# Altium PCB ioT.PcbDoc (part 1 of 3)
Units mm, origin at the board's own origin, x right, y up, seen from the top; angles counter-clockwise.
Board outline 92 x 94 mm, 4 copper layers (Top Layer, GROUND, POWER, Bottom Layer), stack 1.369 mm thick; 127 components, 88 nets, 449 pads, 105 vias.
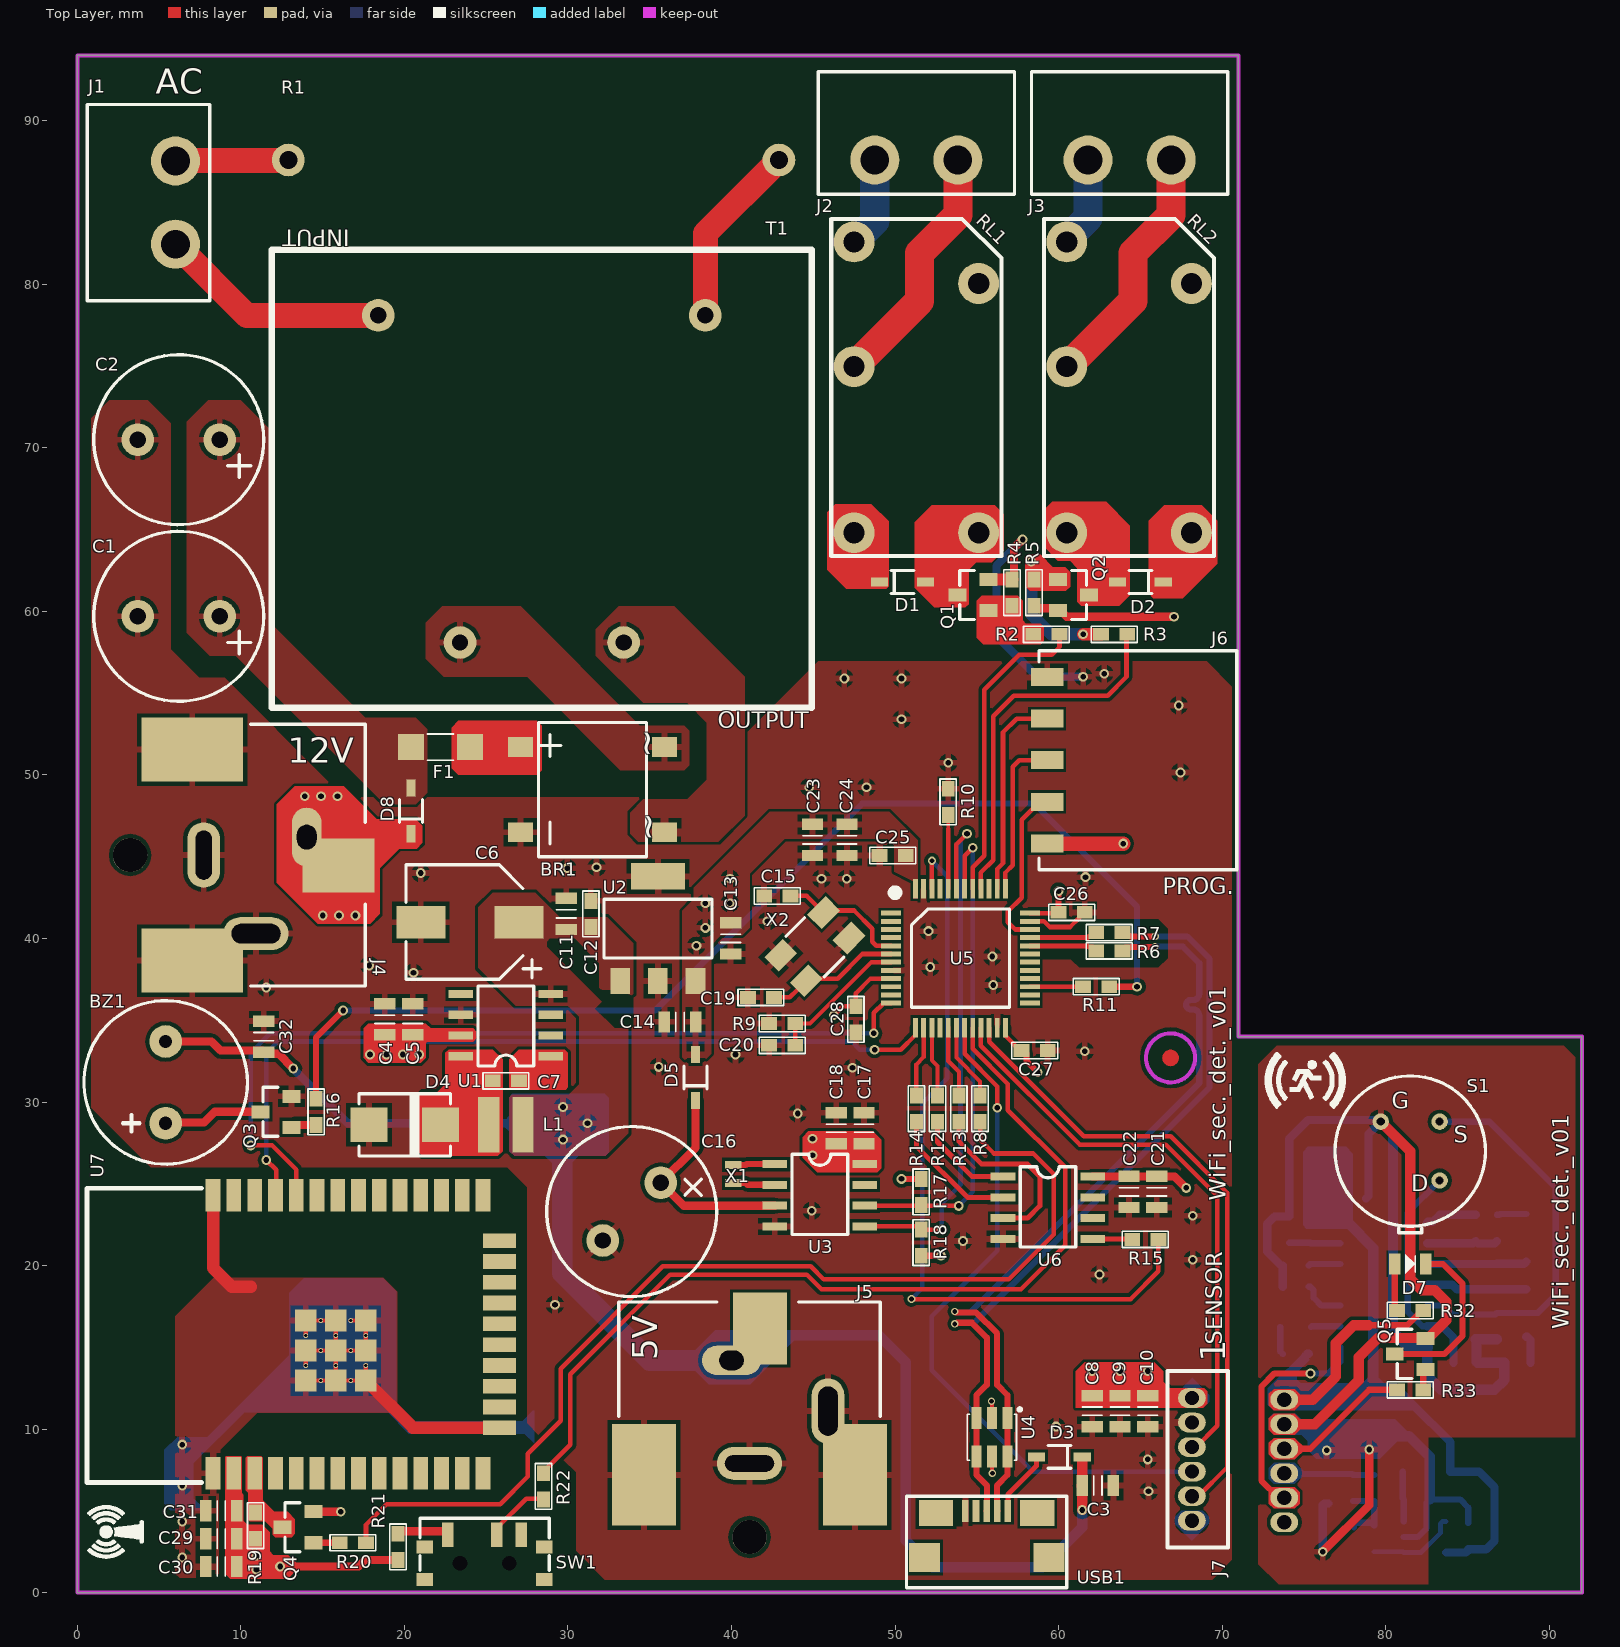
[diagram p0: Top Layer view]
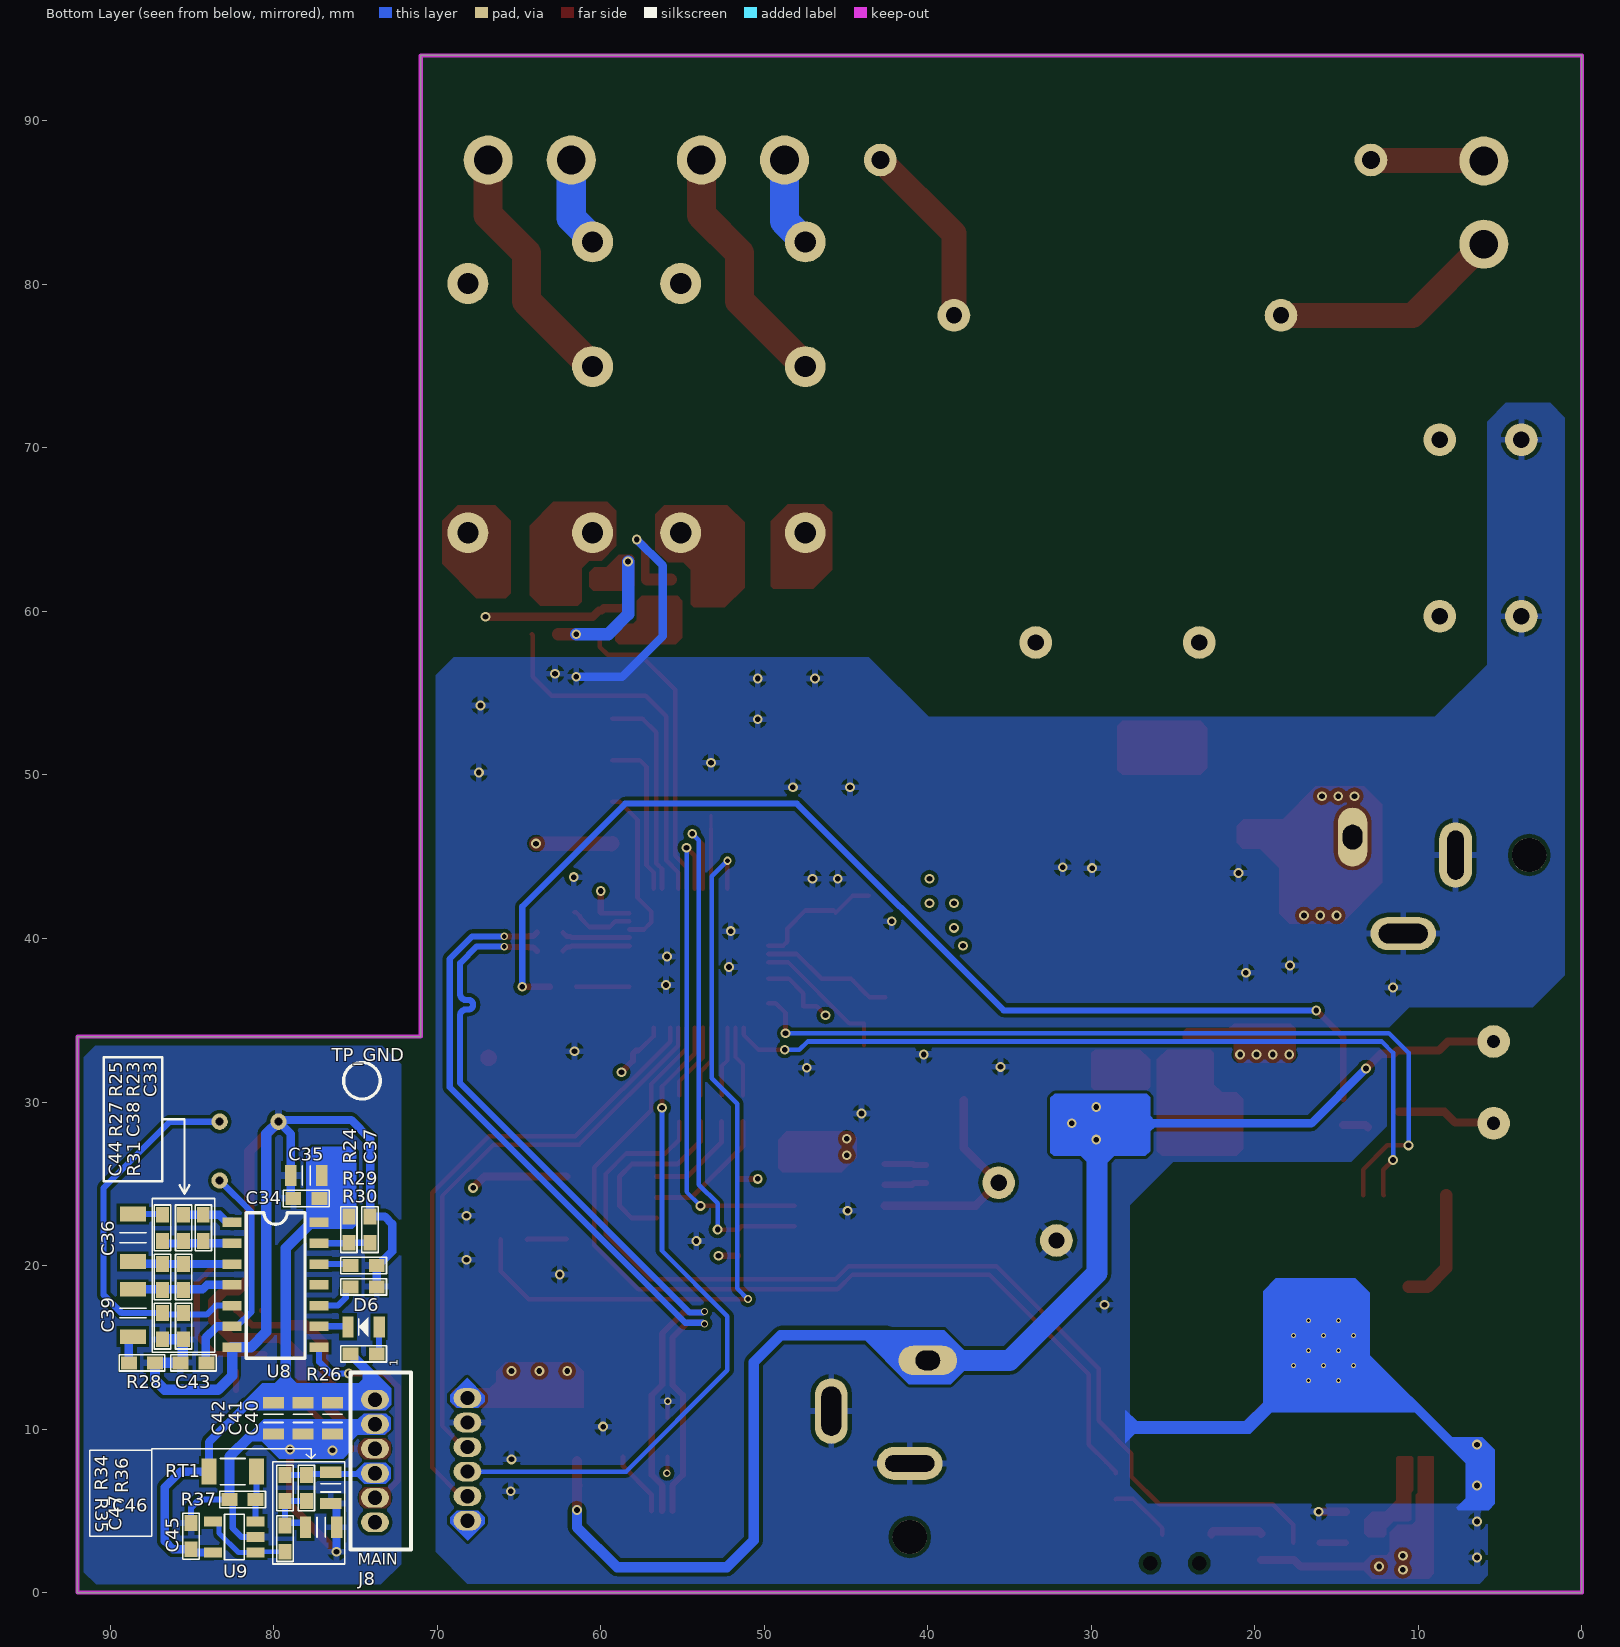
[diagram p1: Bottom Layer view, seen from below]
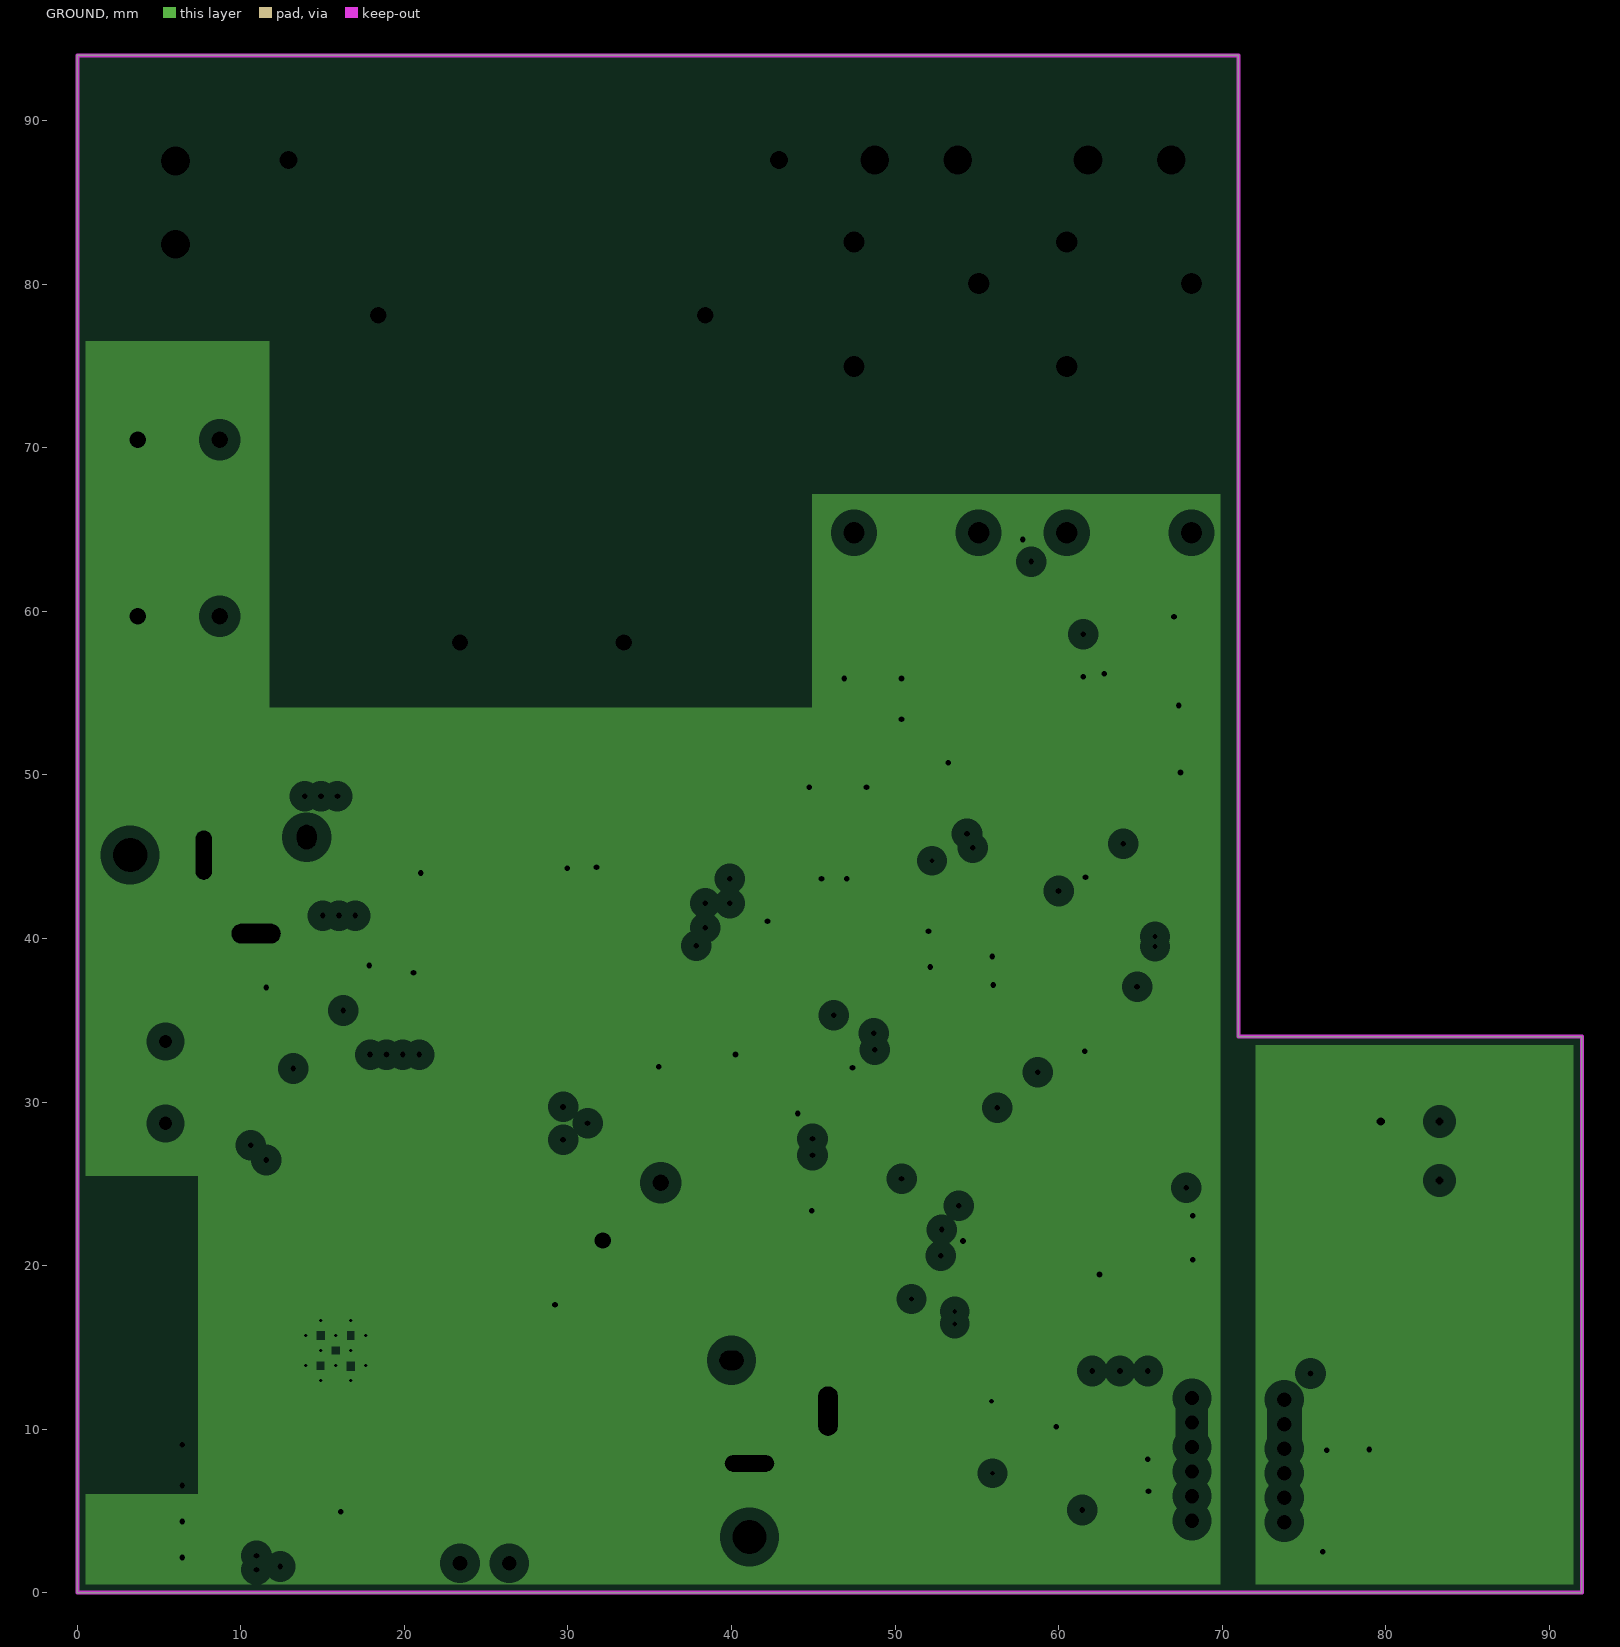
[diagram p2: GROUND, clearances drawn from the general rule]
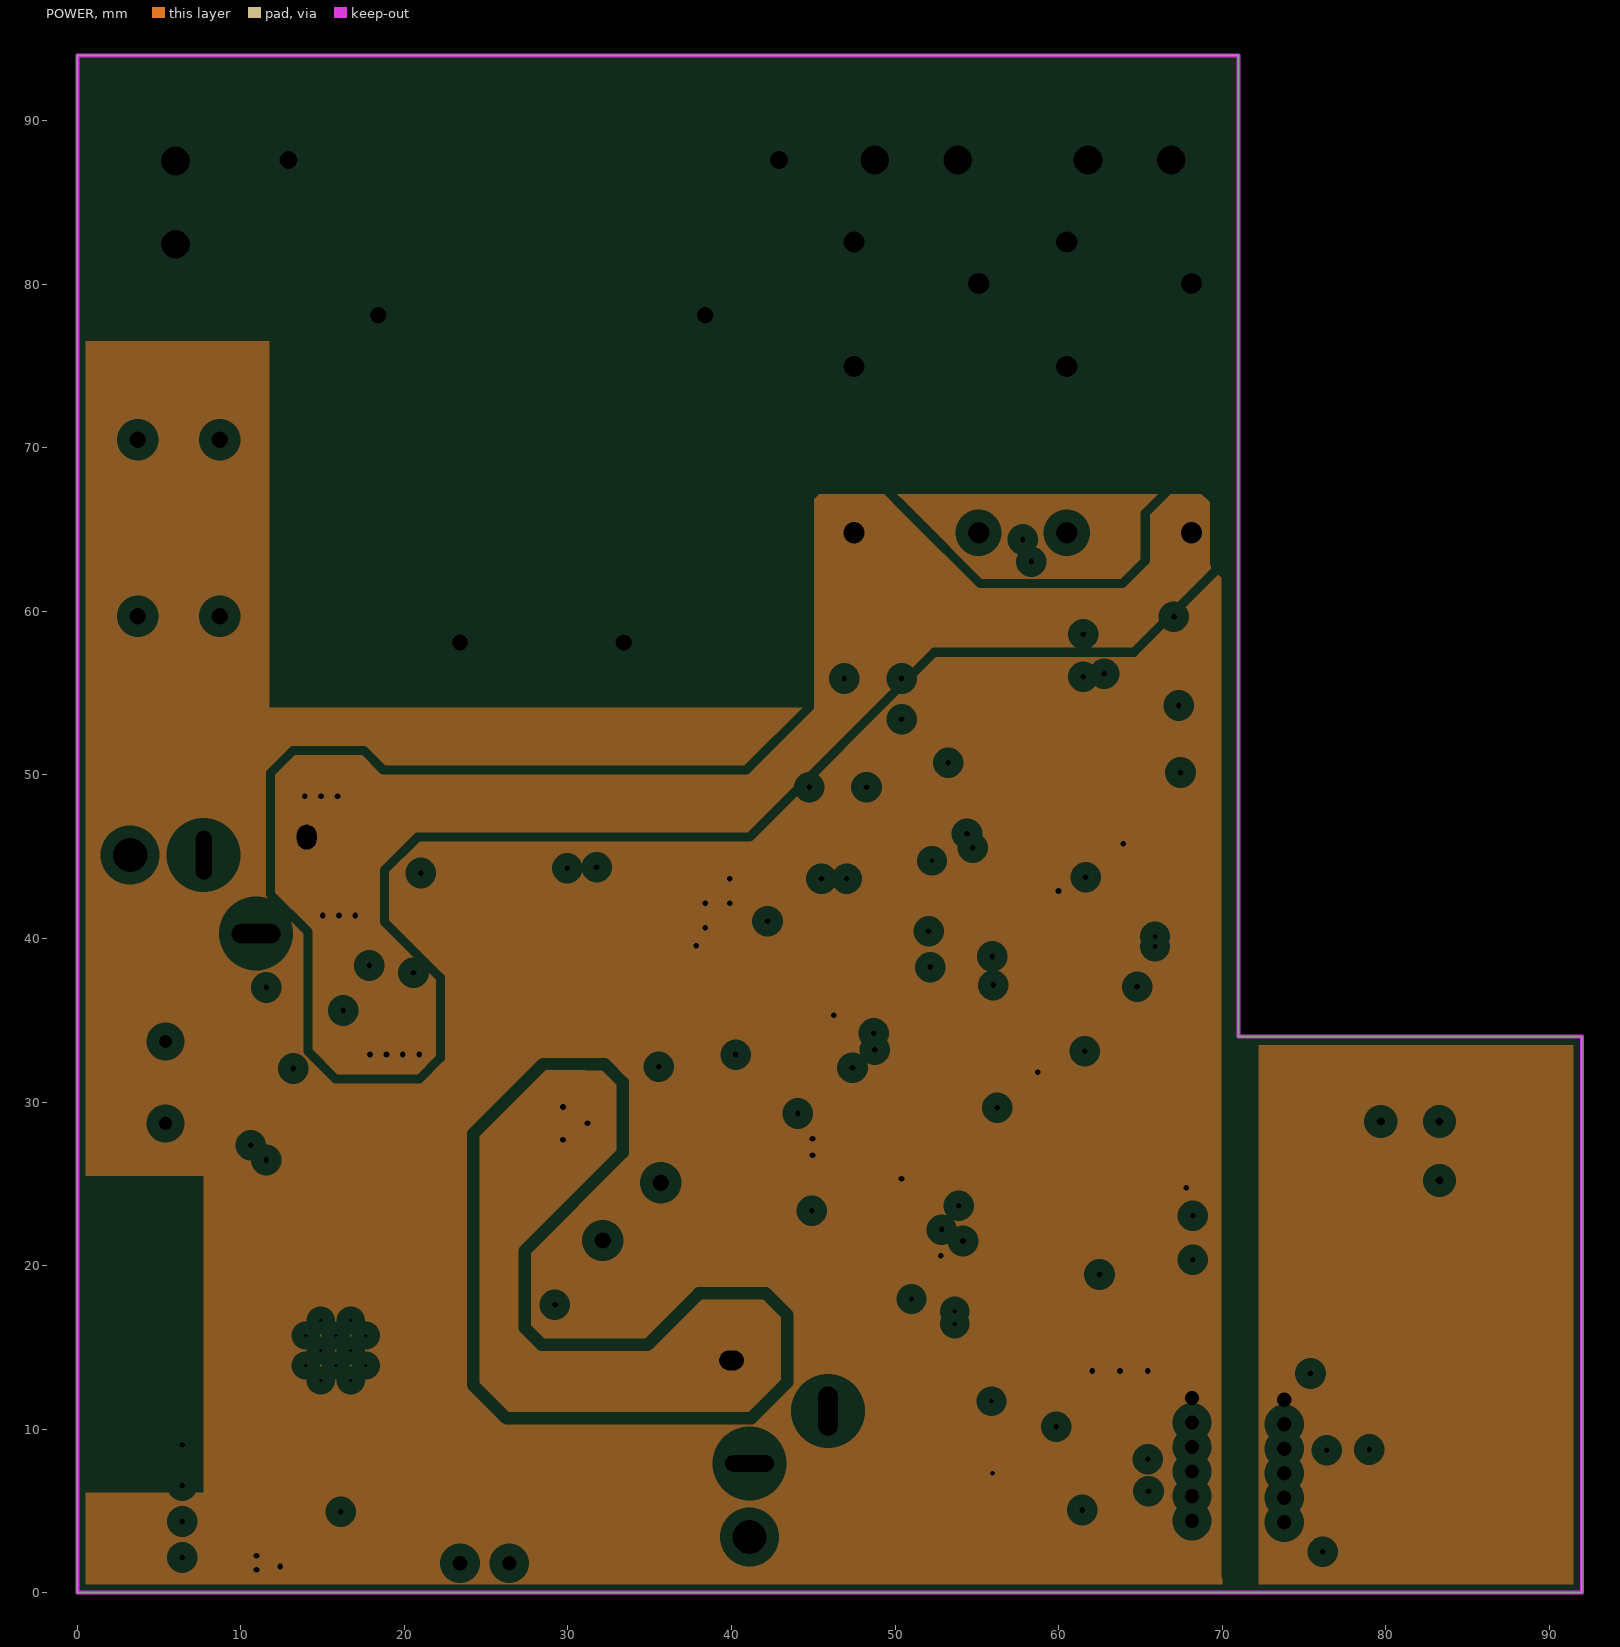
[diagram p3: POWER, clearances drawn from the general rule]
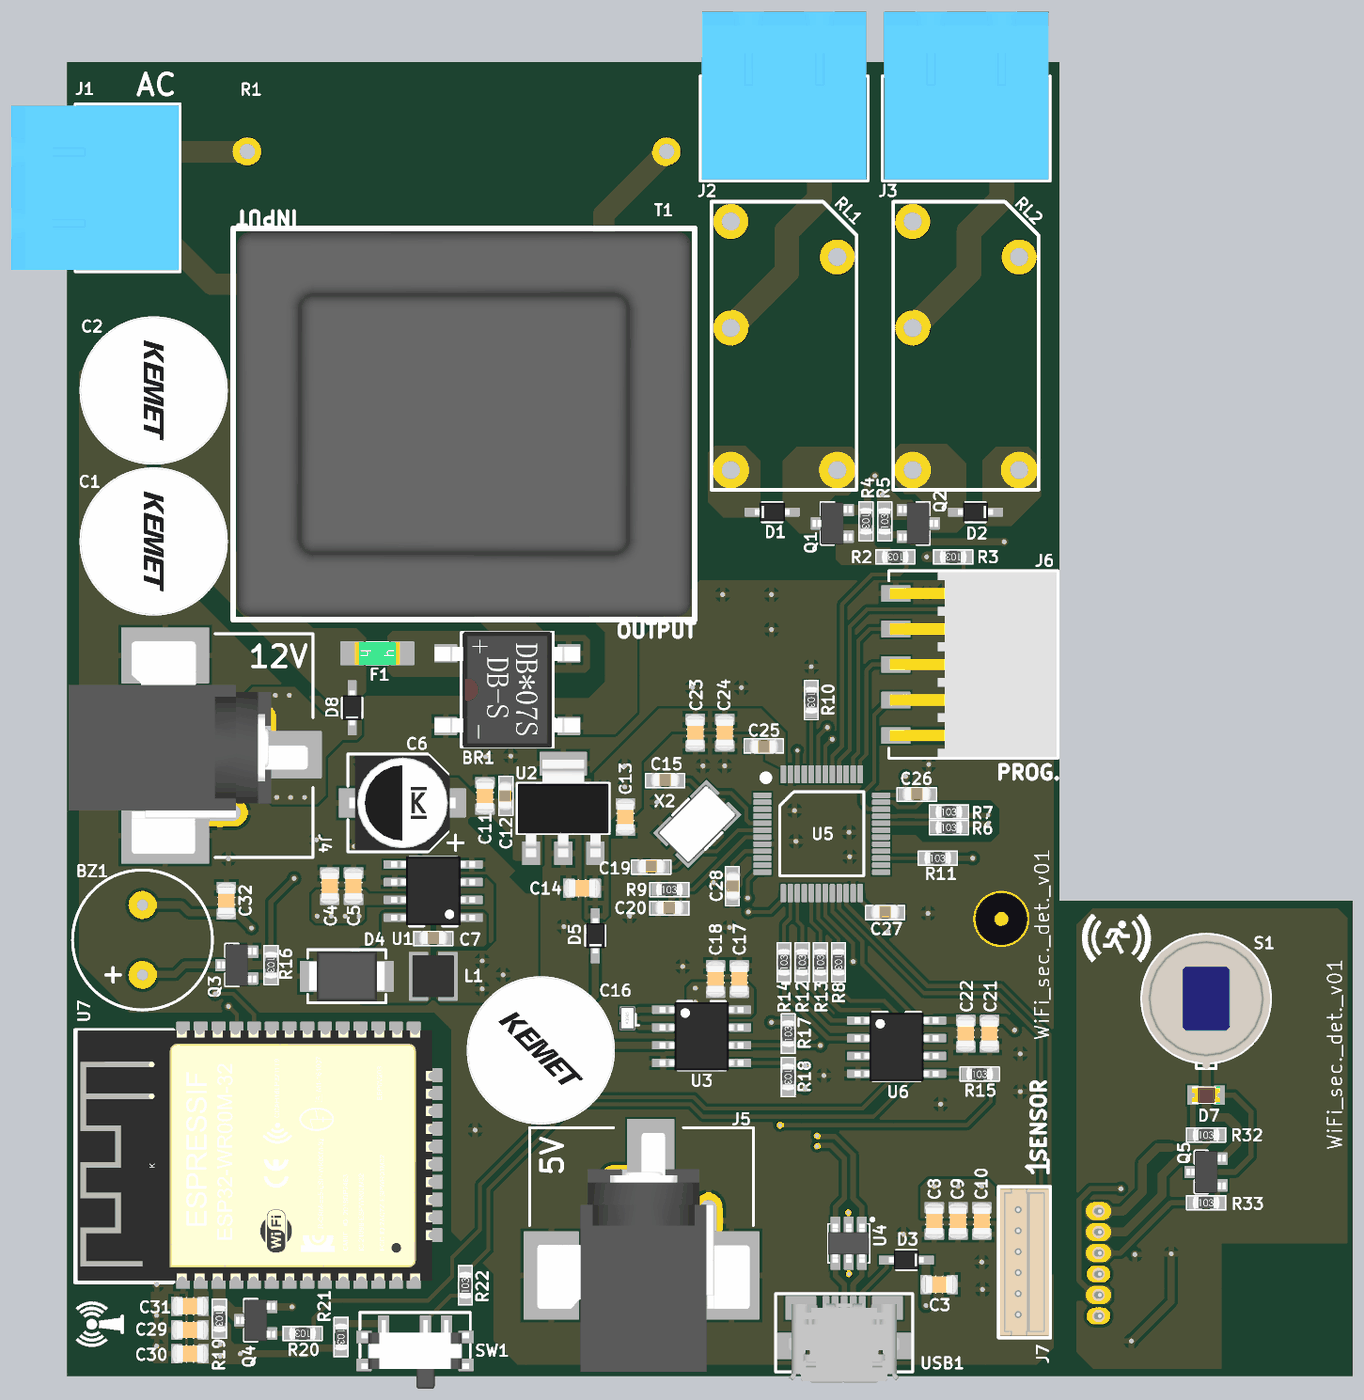
[diagram p5: 3D render of the assembled board from above, using the file's embedded part models]
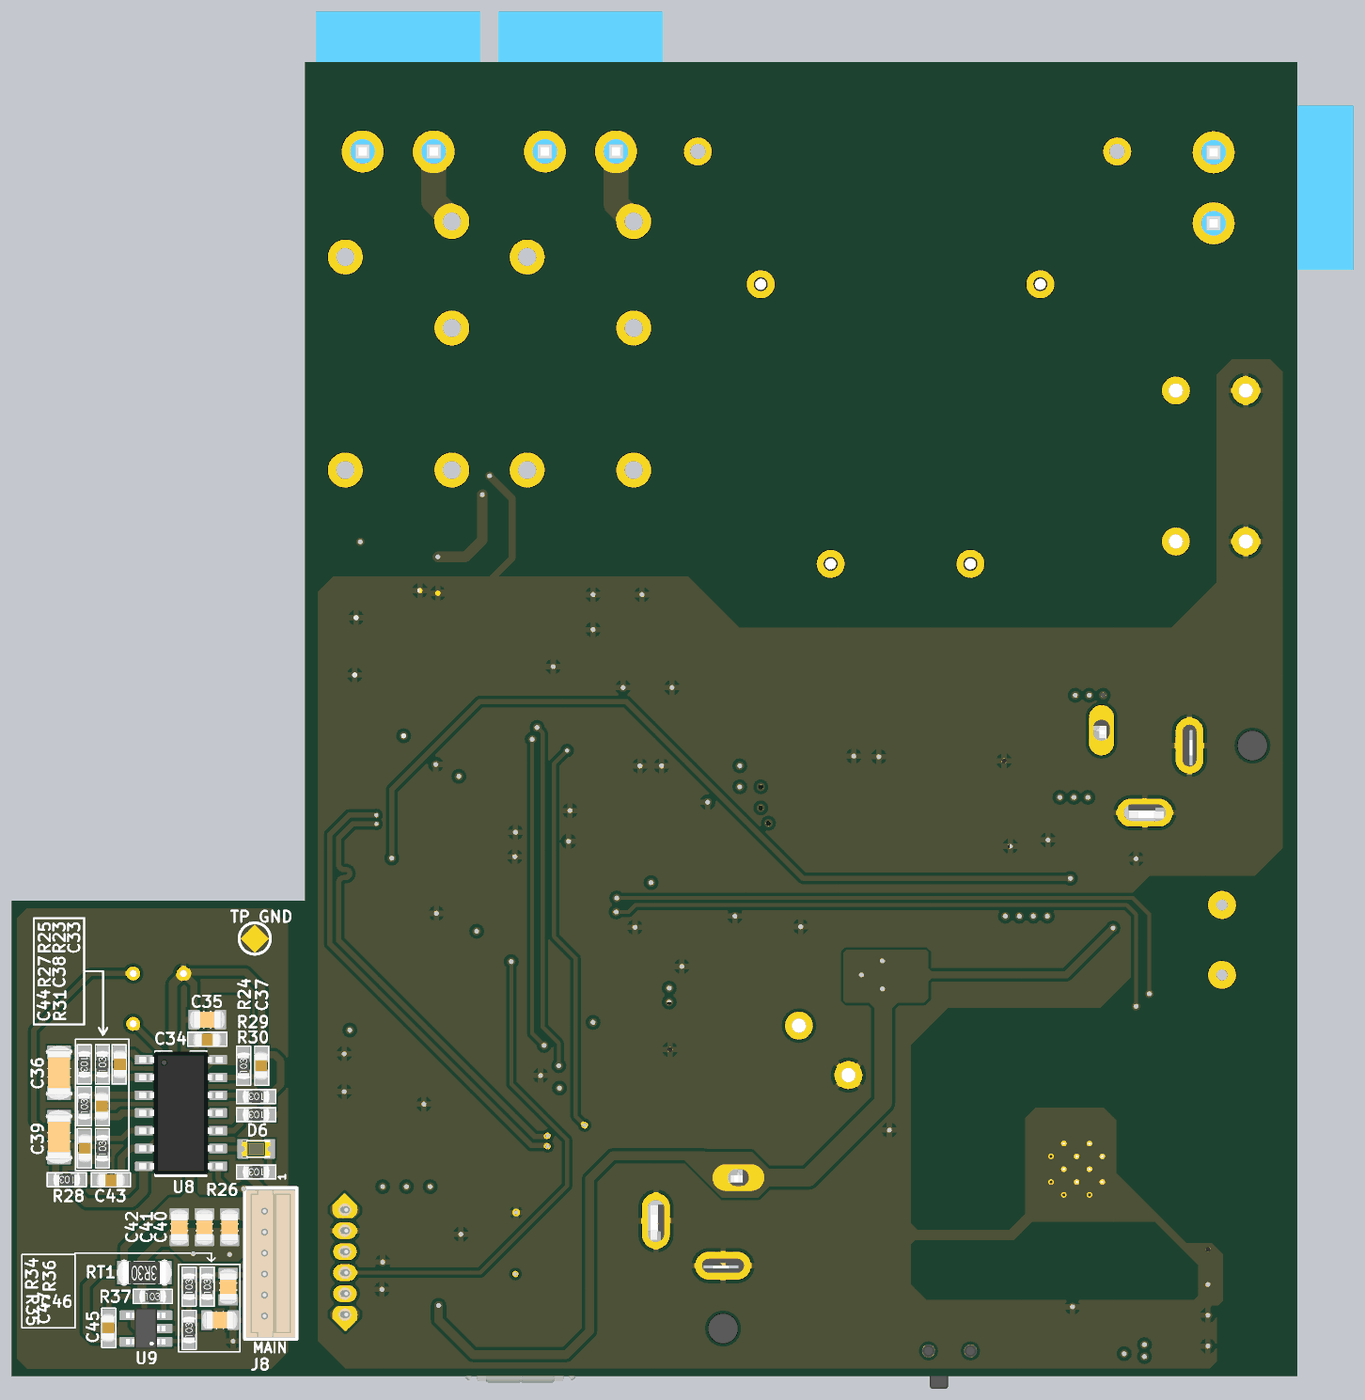
[diagram p6: 3D render of the assembled board from below, using the file's embedded part models]

## Layer stack, top to bottom
Top Solder: solder mask 0.0254, SM-001, Dk 4
Top Layer: signal copper 0.035
Dielectric 1: prepreg 0.1295, PP-017, Dk 4.3
Dielectric 2: prepreg 0.1295, PP-017, Dk 4.3
GROUND: plane copper 0.035, net GND
Dielectric 3: core 0.7112, Core-039, Dk 4.8
POWER: plane copper 0.035, net 3V3DC
Dielectric 4: prepreg 0.1295, PP-017, Dk 4.3
Dielectric 5: prepreg 0.1295, PP-017, Dk 4.3
Bottom Layer: signal copper 0.035
Bottom Solder: solder mask 0.0254, SM-001, Dk 4

## Board outline
0,0 0,94 71,94 71,34 92,34 92,0

## Design rules (kind name [scope] priority, off if disabled: settings)
Clearance [All] p1: gap=0.229 ignorepadtopadclearanceinfootprint=TRUE except(0: Arc-Text Track-Text SMDPad-Text THPad-Text Via-Text Fill-Text Poly-Text Region-Text Text-Text Text-Hole; 0.17: Via-Via; 0.178: Arc-Arc Arc-Track Arc-SMDPad Arc-Via Track-Track Track-SMDPad Track-Via SMDPad-Fill SMDPad-Poly SMDPad-Region Fill-Fill Fill-Poly Fill-Region Poly-Poly Poly-Region Region-Region; 0.203: SMDPad-SMDPad SMDPad-THPad THPad-THPad; 0.254: Arc-THPad Track-THPad SMDPad-Via THPad-Via)
ComponentClearance [All] p1: gap=0.127 collisioncheckmode=3 verticalgap=0 showdistances=FALSE
DiffPairsRouting [InDifferentialPair('MCU')] p1: maxlimit=0.208 minlimit=0.208 mostfreqgap=0.208 toplayer_minwidth=0.305 toplayer_maxwidth=0.305 toplayer_prefwidth=0.305 bottomlayer_minwidth=0.305 bottomlayer_maxwidth=0.305 bottomlayer_prefwidth=0.305 impedanceprofiledriven=TRUE impedanceprofileid={96FB6586-60D9-4EBF-BB90-8EEBB7620552} impedanceprofilevalue=90.000000 maxuncoupledlength=12.7
DiffPairsRouting DiffPairsRouting_1 [All] p2: maxlimit=0.254 minlimit=0.254 mostfreqgap=0.254 toplayer_minwidth=0.374 toplayer_maxwidth=0.374 toplayer_prefwidth=0.374 bottomlayer_minwidth=0.374 bottomlayer_maxwidth=0.374 bottomlayer_prefwidth=0.374 impedanceprofiledriven=TRUE impedanceprofileid={05F002BA-0FC2-4FD2-8811-82B23CEB2897} impedanceprofilevalue=90.000000 maxuncoupledlength=12.7
MinimumSolderMaskSliver [All] p1: minsoldermaskwidth=0.127
NetAntennae [All] p1: netantennaetolerance=0.254
PasteMaskExpansion [All] p1: expansion=0.05
PlaneClearance [All] p1: clearance=0.762
PlaneConnect [All] p1: planeconnectstyle=Relief reliefexpansion=0.381 reliefentries=4 reliefconductorwidth=0.381 reliefairgap=0.254
PolygonConnect [All] p1: connectstyle=Relief reliefconductorwidth=0.381 reliefentries=4 polygonreliefangle="90 Angle" airgapwidth=0.254
RoutingCorners [All] p1: cornerstyle=45-Degree minsetback=2.032 maxsetback=2.032
RoutingVias [All] p1: holewidth=0.3 width=0.5 viastyle="Through Hole" minholewidth=0.25 minwidth=0.4 maxholewidth=0.5 maxwidth=1
SMDToCorner [All] p1: distance=10000
SilkToSilkClearance [All] p1 off: silktosilkclearance=0
SilkToSolderMaskClearance [IsPad] p1 off: minsilkscreentomaskgap=0.127 clearancetoexposedcopper=TRUE
SolderMaskExpansion [All] p1: expansion=0.05 istentingtop=FALSE
UnRoutedNet [All] p1: checkbadconnections=TRUE
Width [All] p1: maxlimit=1.778 minlimit=0.203 preferedwidth=0.279 minimp=50.000000 maximp=50.000000 favimp=50.000000
19 further rules are at their usual default settings.

## Classes and differential pairs
component class "Sensor Board": C33 C34 C35 C36 C37 C38 C39 C40 C41 C42 C43 C44 C45 C46 C47 D6 D7 J8 Q5 R23 R24 R25 R26 R27 R28 R29 R30 R31 R32 R33 R34 R35 R36 R37 RT1 S1 U8 U9
component class "Power Management": BR1 C1 C2 C3 C4 C5 C6 C7 C8 C9 C10 C11 C12 C13 C14 D1 D2 D3 D4 D8 F1 J1 J2 J3 J4 J5 J6 J7 L1 Q1 Q2 R1 R2 R3 R4 R5 RL1 RL2 U1 U2 USB1
component class Microcontroller: BZ1 C15 C16 C17 C18 C19 C20 C21 C22 C23 C24 C25 C26 C27 C28 C29 C30 C31 C32 D5 Q3 Q4 R6 R7 R8 R9 R10 R11 R12 R13 R14 R15 R16 R17 R18 R19 R20 R21 R22 SW1 U3 U4 U5 U6 U7 X1 X2
differential pair MCU: +MCU_P -MCU_N
differential pair USB: +USB_P -USB_N

## Components (designator, comment, footprint, x,y, rotation, side; value= is the part's Value field where it differs from the comment)
BR1 "DB105STR" DB105STR 31.5,49.1 r90 top
BZ1 "CMI-9605IC-0580T" CMI-9605IC 5.4,31.2 r180 top
C1 "ESH477M050AH4AA" CAP_RADIAL_D10_P5 6.2,59.7 r180 top
C2 "ESH477M050AH4AA" CAP_RADIAL_D10_P5 6.2,70.5 r180 top
C3 "CL21A475KAQNNNE" CAP_0805 62.4,6.55 r180 top
C4 "CL21B105KBFNNNE" CAP_0805 18.8,35.05 r270 top
C5 "CL21B104KBCNNNC" CAP_0805 20.5,35.05 r270 top
C6 "EEV686M035A9HAA" CAP_EEVSERIES 24,41 r180 top
C7 "0603B103K160CT" CAP_0603 26.2,31.3 r180 top
C8 "CL21A475KAQNNNE" CAP_0805 62.05,11.1 r90 top
C9 "CL21A475KAQNNNE" CAP_0805 63.75,11.1 r90 top
C10 "CL21B105KBFNNNE" CAP_0805 65.45,11.1 r90 top
C11 "CL21B105KBFNNNE" CAP_0805 29.9,41.5 r270 top
C12 "C0603C104K5RACTU" CAP_0603 31.4,41.5 r270 top
C13 "CL21A475KAQNNNE" CAP_0805 39.95,40 r90 top
C14 "CL21B105KBFNNNE" CAP_0805 36.85,34.9 r0 top
C15 "CL10C200JB8NNNC" CAP_0603 42.8,42.6 r180 top
C16 "ESH477M050AH4AA" CAP_RADIAL_D10_P5 33.9,23.3 r225 top
C17 "CL21B104KBCNNNC" CAP_0805 48.1,28.4 r270 top
C18 "CL21B105KBFNNNE" CAP_0805 46.4,28.4 r270 top
C19 "CL10C200JB8NNNC" CAP_0603 41.8,36.4 r180 top
C20 "C0603C104K5RACTU" CAP_0603 43.1,33.468 r180 top
C21 "CL21B105KBFNNNE" CAP_0805 66,24.5 r90 top
C22 "CL21B104KBCNNNC" CAP_0805 64.3,24.5 r90 top
C23 "CL21A475KAQNNNE" CAP_0805 44.95,46.024 r90 top
C24 "CL21B105KBFNNNE" CAP_0805 47.059,46.024 r90 top
C25 "C0603C104K5RACTU" CAP_0603 49.855,45.074 r0 top
C26 "C0603C104K5RACTU" CAP_0603 60.8,41.6 r180 top
C27 "C0603C104K5RACTU" CAP_0603 58.538,33.151 r180 top
C28 "C0603C104K5RACTU" CAP_0603 47.6,35.05 r90 top
C29 "CL21A475KAQNNNE" CAP_0805 8.8,3.3 r0 top
C30 "CL21B105KBFNNNE" CAP_0805 8.8,1.6 r0 top
C31 "CL21B104KBCNNNC" CAP_0805 8.8,5 r0 top
C32 "CL21B104KBCNNNC" CAP_0805 11.4,34 r270 top
C33 "0603B103K160CT" CAP_0603 84.3,22.3 r90 bottom
C34 "C0603C104K5RACTU" CAP_0603 78,24.1 r180 bottom
C35 "CL21B105KBFNNNE" CAP_0805 78,25.5 r180 bottom
C36 "C3216X5R1E336M160AC" CAP_1206 88.6,21.7 r90 bottom
C37 "C0603C104K5RACTU" CAP_0603 74.1,22.2 r270 bottom
C38 "0603B103K160CT" CAP_0603 85.5,19.3 r270 bottom
C39 "C3216X5R1E336M160AC" CAP_1206 88.6,17.1 r90 bottom
C40 "CL21A475KAQNNNE" CAP_0805 76.4,10.65 r90 bottom
C41 "CL21A475KAQNNNE" CAP_0805 78.2,10.65 r90 bottom
C42 "CL21B105KBFNNNE" CAP_0805 80,10.65 r90 bottom
C43 "C0603C104K5RACTU" CAP_0603 84.9,14.05 r180 bottom
C44 "C0603C104K5RACTU" CAP_0603 86.8,16.3 r90 bottom
C45 "C0603C104K5RACTU" CAP_0603 85.05,3.45 r270 bottom
C46 "CL21A475KAQNNNE" CAP_0805 77.1,4 r0 bottom
C47 "CL21B105KBFNNNE" CAP_0805 76.5,6.4 r90 bottom
D1 "1N4148WS" SOD323F 50.455,61.8 r0 top
D2 "1N4148WS" SOD323F 65,61.8 r180 top
D3 "1N4148WS" SOD323F 60.05,8.3 r180 top
D4 "1SMB5919BT3G" SMB 20.015,28.6 r180 top
D5 "1N4148WS" SOD323F 37.8,31.5 r90 top
D6 "LTST-C171GKT" LED_GREEN_0805 74.5,16.25 r180 bottom
D7 "LH R974-LP-1" LED_RED_0805 81.5,20.1 r180 top
D8 "1N4148WS" SOD323F 20.4,47.8 r90 top
F1 "3413.0216.22" 3413.0216.22 22.2,51.7 r180 top
J1 "TBP01R1-508-02BE" TBP01R1-508 6,85 r270 top
J2 "TBP01R1-508-02BE" TBP01R1-508 51.3,87.6 r180 top
J3 "TBP01R1-508-02BE" TBP01R1-508 64.34,87.6 r180 top
J4 "PJ-037AH-SMT-TR" JACK 9.6,45.1 r0 top
J5 "PJ-037AH-SMT-TR" JACK 41.1,9.775 r90 top
J6 "SMH-105-02-L-S" PINHEADER1X5_RA 59.3,50.9 r90 top
J7 "64800611622" 64800611622 68.15,8.15 r270 top
J8 "64800611622" 64800611622 73.8,8.05 r270 bottom
L1 "78438335470" IND_1212 26.2,28.6 r0 top
Q1 "MMBT3904-7-F" SOT-23F 54.755,61 r90 top
Q2 "MMBT3904-7-F" SOT-23F 60.9,61 r270 top
Q3 "MMBT3904-7-F" SOT-23F 12.145,29.4 r90 top
Q4 "MMBT3904-7-F" SOT-23F 13.5,4 r90 top
Q5 "MMBT3904-7-F" SOT-23F 81.5,14.6 r90 top
R1 "5WD27" RES_AXIAL_W 27.9,87.6 r0 top
R2 "RC0603FR-0710KL" RES_0603 59.255,58.6 r180 top
R3 "RC0603FR-0710KL" RES_0603 63.4,58.6 r180 top
R4 "RC0603FR-0710KL" RES_0603 57.155,61.15 r270 top
R5 "RC0603FR-0710KL" RES_0603 58.5,61.15 r90 top
R6 "RC0603JR-0715RL" RES_0603 63.1,39.241 r0 top
R7 "RC0603JR-0715RL" RES_0603 63.1,40.359 r0 top
R8 "RC0603JR-07100RL" RES_0603 55.2,29.6 r270 top
R9 "RC0603JR-07100RL" RES_0603 43.1,34.8 r0 top
R10 "RC0603JR-07100RL" RES_0603 53.25,48.35 r270 top
R11 "RC0603JR-07100RL" RES_0603 62.3,37.05 r0 top
R12 "RC0603JR-07100RL" RES_0603 52.6,29.6 r90 top
R13 "RC0603JR-07100RL" RES_0603 53.9,29.6 r90 top
R14 "RC0603JR-07100RL" RES_0603 51.3,29.6 r90 top
R15 "RC0603JR-07100RL" RES_0603 65.3,21.6 r0 top
R16 "RC0603JR-07100RL" RES_0603 14.6,29.4 r270 top
R17 "RC0603JR-074K7L" RES_0603 51.6,24.5 r90 top
R18 "RC0603JR-074K7L" RES_0603 51.6,21.4 r270 top
R19 "RC0603FR-0710KL" RES_0603 10.9,4.1 r270 top
R20 "RC0603JR-07100RL" RES_0603 16.85,3.05 r180 top
R21 "RC0603JR-07100RL" RES_0603 19.6,2.8 r270 top
R22 "RC0603JR-07100RL" RES_0603 28.5,6.5 r90 top
R23 "RC0603JR-07560KL" RES_0603 85.5,22.3 r90 bottom
R24 "RC0603JR-07220KL" RES_0603 75.4,22.2 r90 bottom
R25 "RC0603FR-0710KL" RES_0603 86.8,22.3 r270 bottom
R26 "RC0603FR-0710KL" RES_0603 74.5,14.6 r0 bottom
R27 "RC0603JR-07560KL" RES_0603 86.8,19.3 r90 bottom
R28 "RC0603FR-0710KL" RES_0603 88.05,14.05 r0 bottom
R29 "RC0603JR-070RL" RES_0603 74.5,20 r0 bottom
R30 "RC0603JR-070RL" RES_0603 74.5,18.7 r0 bottom
R31 "RC0603JR-0743KL" RES_0603 85.5,16.3 r90 bottom
R32 "RC0603JR-07100RL" RES_0603 81.5,17.25 r0 top
R33 "RC0603FR-0710KL" RES_0603 81.5,12.4 r0 top
R34 "RC0603JR-07220KL" RES_0603 79.3,6.4 r90 bottom
R35 "RC0603FR-0710KL" RES_0603 79.3,3.3 r90 bottom
R36 "RC0603JR-07220KL" RES_0603 78,6.4 r90 bottom
R37 "RC0603FR-0710KL" RES_0603 81.9,5.7 r180 bottom
RL1 "ALQ112" ALQ112 51.3,73.7 r90 top
RL2 "ALQ112" ALQ112 64.31,73.7 r90 top
RT1 "TFPT1206L1002FM" RES_1206 82.5,7.4 r0 bottom
S1 "LHI 878/3902" "LHI 878" 81.5,27 r0 top
SW1 "EG1215AA" EG1215AA 24.9,1.8 r0 top
T1 "BV302S12010-ZU" BV302S 28.4,68.1 r0 top
U1 "LM2675MX-12/NOPB" SOIC8 26.2,34.7 r90 top
U2 "AP7361-33E-13" SOT223 35.5,40.6 r0 top
U3 "M41T00M6F" SOIC8 45.4,24.3 r270 top
U4 "USBLC6-2SC6" SOT23-6L 55.925,9.5 r270 top
U5 "STM32F103C6T6A" LQFP-48 54,38.8 r270 top
U6 "MAX6662" SOIC8 59.35,23.535 r270 top
U7 "ESP32-WROOM-32" ESP32-32 13.56,15.8 r90 top
U8 "NCS36000DRG" SOIC14 79.881,18.824 r180 bottom
U9 "OPA314AIDBVR" SOT23-5 82.4,3.4 r0 bottom
USB1 "10118192-0001LF" MICRO_B_USB 55.6,5 r0 top
X1 "ABS05-32.768KHZ-T" ABS05 40.1,25.6 r90 top
X2 "ECS-160-20-30B-TR" ECS 45.1,39.5 r45 top

## Footprints (in the part's own frame and the unit in brackets; to place one, negate y for a bottom-side part, rotate by r counter-clockwise, add the part's x,y. Pads: shape width x height; smd on the part's side, far side on the other; paste and mask are expansions set on the pad)
3413.0216.22 [mm]
  rect 1.6x1.6 smd mask+0.05: 1(-1.8,0) 2(1.8,0)
  silkscreen extent -0.8,-0.8 0.8,0.8, body extent -1.61,-0.8 1.61,0.8, height 0.64
64800611622 [mm]
  oval 1.2x1.7 hole 0.87 mask+0.05: 1(-3.75,0) 2(-2.25,0) 3(-0.75,0) 4(0.75,0) 5(2.25,0) 6(3.75,0)
  silkscreen extent -5.4,-1.5 5.4,2.2, body extent -5.25,-1.4 5.25,2.1, height 4.75
ABS05 [mm]
  rect 0.5x1 smd mask+0.05: 1(-0.55,0) 2(0.55,0)
  body extent -0.8,-0.5 0.8,0.5, height 0.5
ALQ112 [mm]
  round 2.5 hole 1.3 mask+0.05: 1(6.35,-3.81) 2(1.27,3.81) 3(8.89,3.81) 4(-8.89,-3.81) 5(-8.89,3.81)
  silkscreen extent -10.3,-5.2 10.3,5.2, body extent -10,-4.98 10,5.02, height 15.6
BV302S [mm]
  round 2 hole 1 mask+0.05: 1(10,10) 5(-10,10) 7(-5,-10) 9(5,-10)
  silkscreen extent -16.5,-14 16.5,14, body extent -16.25,-13.75 16.25,13.75, height 21.8
CAP_0603 [mil]
  rect 38x31 smd mask+1.97: 1(-31.5,0) 2(31.5,0)
  silkscreen extent -55,-20 55,20, body extent -41,-22 41,18, height 31
CAP_0805 [mm]
  rect 0.7x1.3 smd mask+0.05: 1(-0.95,0) 2(0.95,0)
  silkscreen extent -0.25,-0.6 0.25,0.6, body extent -1.3,-0.68 1.3,0.68, height 0.9
CAP_1206 [mm]
  rect 0.9x1.6 smd mask+0.05: 1(-1.45,0) 2(1.45,0)
  silkscreen extent -0.3,-0.8 0.3,0.8, body extent -1.97,-0.98 1.97,0.98, height 1.3
CAP_EEVSERIES [mm]
  rect 3x2 smd mask+0.05: 1(-3,0) 2(3,0)
  silkscreen extent -4.35,-3.5 3.9,3.5, body extent -3.8,-3.4 3.8,3.4, height 8.01
CAP_RADIAL_D10_P5 [mm]
  round 2 hole 1 mask+0.05: 1(-2.5,0) 2(2.5,0)
  silkscreen extent -5.2,-5.2 5.2,5.2, body extent -5.25,-5.25 5.25,5.25, height 22.2
CMI-9605IC [mm]
  round 2 hole 0.8 mask+0.05: 1(0,2.5) 2(0,-2.5)
  silkscreen extent -5,-5 5,5, body extent -4.8,-4.8 4.8,5.8, height 5.2
DB105STR [mm]
  rect 1.2x1.55 smd mask+0.05: 1(-2.605,-4.4) 2(2.605,-4.4) 3(2.605,4.4) 4(-2.605,4.4)
  silkscreen extent -4.1,-3.3 4.1,3.3, body extent -4.16,-5.2 4.16,5.2, height 2.66
ECS [mm]
  rect 1.6x1.25 smd mask+0.05: 1(-1.85,-1.1) 2(1.85,-1.1) 3(1.85,1.1) 4(-1.85,1.1)
  silkscreen extent -0.9,-1.7 0.8,1.7, body extent -2.5,-1.6 2.5,1.6, height 0.85
EG1215AA [mm]
  rect 0.7x1.5 smd mask+0.05: 1(-2.25,1.75) 2(0.75,1.75) 3(2.25,1.75)
  rect 1x0.8 smd mask+0.05: ""(-3.65,-1) ""(-3.65,1) ""(3.65,-1) ""(3.65,1)
  round 0 hole 0.9 mask+0.05: ""(-1.5,0) ""(1.5,0)
  silkscreen extent -3.95,-0.45 3.95,2.75, body extent -3.85,-2.7 3.85,2.2, height 1.38
ESP32-32 [mm]
  rect 2x0.9 smd mask+0.05: 1(-8.5,5.26) 2(-8.5,3.99) 3(-8.5,2.72) 4(-8.5,1.45) 5(-8.5,0.18) 6(-8.5,-1.09) 7(-8.5,-2.36) 8(-8.5,-3.63) 9(-8.5,-4.9) 10(-8.5,-6.17) 11(-8.5,-7.44) 12(-8.5,-8.71) 13(-8.5,-9.98) 14(-8.5,-11.25) 25(8.5,-11.25) 26(8.5,-9.98) 27(8.5,-8.71) 28(8.5,-7.44) 29(8.5,-6.17) 30(8.5,-4.9) 31(8.5,-3.63) 32(8.5,-2.36) 33(8.5,-1.09) 34(8.5,0.18) 35(8.5,1.45) 36(8.5,2.72) 37(8.5,3.99) 38(8.5,5.26)
  rect 0.9x2 smd mask+0.05: 15(-5.715,-12.25) 16(-4.445,-12.25) 17(-3.175,-12.25) 18(-1.905,-12.25) 19(-0.635,-12.25) 20(0.635,-12.25) 21(1.905,-12.25) 22(3.175,-12.25) 23(4.445,-12.25) 24(5.715,-12.25)
  rect 1.33x1.33 smd mask+0.05: 39(-2.835,-2.24) 39(-2.835,-0.405) 39(-2.835,-4.075) 39(-1,-0.405) 39(-1,-4.075) 39(-1,-2.24) 39(0.835,-0.405) 39(0.835,-4.075) 39(0.835,-2.24)
  round 0.3 hole 0.2 mask+0.05: 39(-2.835,-1.322) 39(-2.835,-3.157) 39(-1.917,-2.24) 39(-1.917,-0.405) 39(-1.917,-4.075) 39(-1,-1.322) 39(-1,-3.157) 39(-0.082,-0.405) 39(-0.082,-2.24) 39(-0.082,-4.075) 39(0.835,-1.322) 39(0.835,-3.157)
  silkscreen extent -9.07,5.97 8.93,12.97, body extent -8.97,-12.6 8.93,12.8, height 2.61
IND_1212 [mm]
  rect 1.3x3.4 smd mask+0.05: 1(-1.05,0) 2(1.05,0)
  body extent -1.5,-1.5 1.5,1.5, height 1.2
JACK [mm]
  oval 1.8x3.6 hole 1.2 slot 1.5 at 90 deg: 1(4.425,1.1)
  rect 4.4x3.3 smd: 1(6.375,-0.65)
  rect 6.2x3.9 smd: 2(-2.575,6.45) 3(-2.575,-6.45)
  oval 2x4 hole 1 slot 3 at 90 deg: 2(-1.875,0)
  oval 4x2 hole 1.2 slot 3 at 0 deg: 3(1.325,-4.8)
  round 2.1 hole 2.1 unplated: ""(-6.375,0)
  silkscreen extent 1,-8 8,8, body extent -9.48,-7.75 7.62,7.45, height 11.1
LED_GREEN_0805 [mm]
  rect 0.7x1.3 smd mask+0.05: 1(-0.95,0) 2(0.95,0)
  silkscreen extent -0.3,-0.6 0.3,0.6, body extent -1.01,-0.63 1.01,0.62, height 1.1
LED_RED_0805 [mm]
  rect 0.7x1.3 smd mask+0.05: 1(-0.95,0) 2(0.95,0)
  silkscreen extent -0.3,-0.6 0.3,0.6, body extent -1.01,-0.63 1.01,0.62, height 1.1
"LHI 878" [mm]
  round 1 hole 0.5 mask+0.05: 1(1.8,-1.8) 2(1.8,1.8) 3(-1.8,1.8)
  silkscreen extent -4.6,-5 4.6,4.6, body extent -4.6,-5.03 4.6,4.6, height 4.6
LQFP-48 [mm] "7mm x 7mm"
  rect 0.3x1.2 smd mask+0.05: 1(-2.75,-4.25) 2(-2.25,-4.25) 3(-1.75,-4.25) 4(-1.25,-4.25) 5(-0.75,-4.25) 6(-0.25,-4.25) 7(0.25,-4.25) 8(0.75,-4.25) 9(1.25,-4.25) 10(1.75,-4.25) 11(2.25,-4.25) 12(2.75,-4.25) 25(2.75,4.25) 26(2.25,4.25) 27(1.75,4.25) 28(1.25,4.25) 29(0.75,4.25) 30(0.25,4.25) 31(-0.25,4.25) 32(-0.75,4.25) 33(-1.25,4.25) 34(-1.75,4.25) 35(-2.25,4.25) 36(-2.75,4.25)
  rect 1.2x0.3 smd mask+0.05: 13(4.25,-2.75) 14(4.25,-2.25) 15(4.25,-1.75) 16(4.25,-1.25) 17(4.25,-0.75) 18(4.25,-0.25) 19(4.25,0.25) 20(4.25,0.75) 21(4.25,1.25) 22(4.25,1.75) 23(4.25,2.25) 24(4.25,2.75) 37(-4.25,2.75) 38(-4.25,2.25) 39(-4.25,1.75) 40(-4.25,1.25) 41(-4.25,0.75) 42(-4.25,0.25) 43(-4.25,-0.25) 44(-4.25,-0.75) 45(-4.25,-1.25) 46(-4.25,-1.75) 47(-4.25,-2.25) 48(-4.25,-2.75)
  silkscreen extent -4.2,-4.2 3,3, body extent -4.45,-4.45 4.55,4.55, height 1.5
MICRO_B_USB [mm]
  rect 0.4x1.35 smd mask+0.05: 1(1.3,0) 2(0.65,0) 3(0,0) 4(-0.65,0) 5(-1.3,0)
  rect 1.9x1.8 smd mask+0.05: ""(-3.8,-2.85) ""(3.8,-2.85)
  rect 2.1x1.6 smd mask+0.05: ""(-3.1,-0.122) ""(3.1,-0.122)
  silkscreen extent -4.9,-4.7 4.9,0.9, body extent -3.96,-5.46 3.96,0.2, height 2.79
PINHEADER1X5_RA [mm]
  rect 1.1x2 smd mask+0.05: 1(-5.08,0) 2(-2.54,0) 3(0,0) 4(2.54,0) 5(5.08,0)
  silkscreen extent -6.7,-11.6 6.7,0.5, body extent -6.6,-11.51 6.6,0.43, height 2.41
RES_0603 [mil]
  rect 38x31 smd mask+1.97: 1(-31.5,0) 2(31.5,0)
  silkscreen extent -55,-20 55,20, body extent -39,-19 39,20, height 17
RES_1206 [mm]
  rect 0.9x1.6 smd mask+0.05: 1(-1.45,0) 2(1.45,0)
  silkscreen extent -0.75,-0.8 0.75,0.8, body extent -1.98,-0.94 1.98,0.94, height 0.55
RES_AXIAL_W [mm]
  round 2 hole 1.1 mask+0.05: 1(-15,0) 2(15,0)
  body extent -15.4,-4.83 15.4,4.83, height 9.65
SMB [mm]
  rect 2.25x2.12 smd mask+0.05: A(2.185,0) C(-2.185,0)
  silkscreen extent -2.8,-1.9 2.8,1.9, body extent -2.72,-1.78 2.72,1.78, height 2.44
SOD323F [mm]
  rect 1.05x0.55 smd mask+0.05: 1(-1.4,0) 2(1.4,0)
  silkscreen extent -0.7,-0.7 0.7,0.7, body extent -1.25,-0.67 1.25,0.68, height 1
SOIC8 [mm]
  rect 0.5x1.5 smd mask+0.05: 1(-1.905,-2.75) 2(-0.635,-2.75) 3(0.635,-2.75) 4(1.905,-2.75) 5(1.905,2.75) 6(0.635,2.75) 7(-0.635,2.75) 8(-1.905,2.75)
  silkscreen extent -2.5,-1.7 2.4,1.7, body extent -2.45,-3 2.45,3, height 1.75
SOIC14 [mm]
  rect 1.18x0.58 smd mask+0.05: 1(-2.66,3.81) 2(-2.66,2.54) 3(-2.66,1.27) 4(-2.66,0) 5(-2.66,-1.27) 6(-2.66,-2.54) 7(-2.66,-3.81) 8(2.66,-3.81) 9(2.66,-2.54) 10(2.66,-1.27) 11(2.66,0) 12(2.66,1.27) 13(2.66,2.54) 14(2.66,3.81)
  silkscreen extent -1.8,-4.5 1.8,4.4, body extent -3,-4.4 3,4.4, height 1.7
SOT23-5 [mm]
  rect 1.1x0.6 smd mask+0.05: 1(-1.3,0.95) 2(-1.3,0) 3(-1.3,-0.95) 4(1.3,-0.95) 5(1.3,0.95)
  silkscreen extent -0.6,-1.4 0.6,1.4, body extent -1.4,-1.45 1.4,1.45, height 1.45
SOT23-6L [mm]
  rect 1.36x0.6 smd mask+0.05: 1(-1.175,0.95) 2(-1.175,0) 3(-1.175,-0.95) 4(1.175,-0.95) 5(1.175,0) 6(1.175,0.95)
  silkscreen extent -1.8,-1.5 1.4,1.8, body extent -1.4,-1.46 1.4,1.46, height 1.45
SOT223 [mm]
  rect 1.2x1.6 smd mask+0.05: 1(-2.3,-3.2) 2(0,-3.2) 3(2.3,-3.2)
  rect 3.3x1.6 smd mask+0.05: 2(0,3.2)
  silkscreen extent -3.3,-1.8 3.3,1.8, body extent -3.25,-3.48 3.25,3.48, height 1.65
SOT-23F [mm]
  rect 0.8x1.1 smd mask+0.05: 1(-0.95,-0.945) 2(0.95,-0.945) 3(0,0.945)
  silkscreen extent -1.5,-0.1 1.5,0.8, body extent -1.5,-1.42 1.5,1.42, height 1.2
TBP01R1-508 [mm]
  round 3 hole 1.75 mask+0.05: 1(-2.54,0) 2(2.54,0)
  silkscreen extent -6,-5.4 6,2.1, body extent -5.88,-10 5.88,2, height 8.55

## Part data
BR1: "Bridge Diode AC-DC", Manufacturer="Sangdest Microelectronics", Max Current=1A, Operating Voltage=600V, Supplier Part Number 1=1655-1821-1-ND, Designed by=BERK, Manufacturer Part Number=DB105STR, RoHS=No, Supplier 1=Digi-Key
BZ1: "Buzzers Indicator, Internally Driven Magnetic 5V 30mA 2.7kHz 80dB @ 5V, 10cm Through Hole PC Pins", Case/Package=CMI-9605IC, Manufacturer="CUI Devices", Supplier Part Number 1=2223-CMI-9605IC-0580T-ND, Designed by=BERK, Manufacturer Part Number=CMI-9605IC-0580T, Pricing 1="1=1,41000, 10=1,17900, 25=1,09080, 50=1,02680, 100=0,96490, 500=0,83018, 1000=0,77805 (USD)", RoHS=No, Stock 1=1663, Supplier 1=Digi-Key
C1 C2 C16: library part "CAP ALU ELEC 470uF 50V", "CAP ALU ELEC 470uF 50V RADIAL", Capacitance=470uF, Case/Package=Radial, Manufacturer=KEMET, Max Operating Temperature=105°C, Min Operating Temperature=-40°C, Supplier Part Number 1=399-15683-ND, Tolerance=20%, Voltage Rating=50V, ComponentLink1Description=https://api.kemet.com/component-edge/download/datasheet/ESH477M050AH4AA.pdf?src-supplier=Digi-Key, ComponentLink1URL=https://api.kemet.com/component-edge/download/datasheet/ESH477M050AH4AA.pdf?src-supplier=Digi-Key, Designed by=BERK, Life (Hours)=2000Hour, Manufacturer Part Number=ESH477M050AH4AA, Mount="Through Hole", Packaging=Bulk, Polarity=Polar, Pricing 1="1=0,59000, 10=0,41700, 50=0,31540, 100=0,27470, 500=0,20350, 1000=0,17298, 2500=0,16280, 5000=0,15262 (USD)", RoHS=No, RoHS Compliant=No, Stock 1=1181, Supplier 1=Digi-Key
C3 C8 C9 C13 C23 C29 C40 C41 C46: library part "CAP CER 4.7uF 0805", "CAP CER 4.7uF %10 0805", Capacitance=4.7uF, Case Code (Metric)=2012, Case Code (Imperial)=0805, Dielectric=X5R, Manufacturer=Samsung, Max Operating Temperature=85°C, Min Operating Temperature=-55°C, Package Quantity=1, Supplier Part Number 1=1276-1244-1-ND, Tolerance=10%, Voltage Rating=25V, Case/Package=0805, Category="Ceramic Capacitors", ComponentLink1Description=https://datasheet.ciiva.com/25798/cl21a475kaqnnne-25798882.pdf?src-supplier=Digi-Key, ComponentLink1URL=https://datasheet.ciiva.com/25798/cl21a475kaqnnne-25798882.pdf?src-supplier=Digi-Key, Construction=Flat, Depth=1.25mm, Designed by=BERK, Height=1.25mm, Lead Free="Lead Free", Length=2mm, Manufacturer Part Number=CL21A475KAQNNNE, Mount="Surface Mount", Packaging="Tape and Reel", Pricing 1="1=0,11000, 10=0,08100, 50=0,04580, 100=0,03800, 500=0,02664, 1000=0,02205 (USD)", Radiation Hardening=No, RoHS=Yes, RoHS Compliant=Yes, series=CL, Stock 1=1477018, Supplier 1=Digi-Key, Thickness=0.055inch, Voltage Rating (DC)=25V, Width=0.049inch
C4 C10 C11 C14 C18 C21 C24 C30 C35 C42 C47: library part "CAP CER 1uF 0805", "CAP CER 1uF %10 0805", Capacitance=1uF, Case Code (Metric)=2012, Case Code (Imperial)=0805, Dielectric=X7R, Manufacturer=Samsung, Max Operating Temperature=125°C, Min Operating Temperature=-55°C, Package Quantity=1, Supplier Part Number 1=1276-1029-2-ND, Tolerance=10%, Voltage=50V, Case/Package=0805, Category="Ceramic Capacitors", ComponentLink1Description=https://datasheet.ciiva.com/25800/cl21b105kbfnnne-25800291.pdf?src-supplier=Digi-Key, ComponentLink1URL=https://datasheet.ciiva.com/25800/cl21b105kbfnnne-25800291.pdf?src-supplier=Digi-Key, ComponentLink2Description=https://datasheet.ciiva.com/16449/cl21b105kbfnnne-16449003.pdf?src-supplier=Future+Electronics, ComponentLink2URL=https://datasheet.ciiva.com/16449/cl21b105kbfnnne-16449003.pdf?src-supplier=Future+Electronics, ComponentLink3Description=https://datasheet.ciiva.com/26838/getdatasheetpartid-354075-26838668.pdf?src-supplier=Verical, ComponentLink3URL=https://datasheet.ciiva.com/26838/getdatasheetpartid-354075-26838668.pdf?src-supplier=Verical, Construction=Flat, Depth=1.25mm, Designed by=BERK, Height=1.25mm, Length=2mm, Manufacturer Part Number=CL21B105KBFNNNE, Mount="Surface Mount", Packaging="Tape and Reel", Pricing 1="2000=0,02138, 4000=0,01956 (USD)", Radiation Hardening=No, RoHS=Yes, RoHS Compliant=Yes, series=CL, Stock 1=958000, Supplier 1=Digi-Key, Thickness=0.053inch, Voltage Rating=50V, Width=0.049inch
C5 C17 C22 C31 C32: library part "CAP CER 100nF 0805", "CAP CER 100nF %10 0805", Capacitance=100nF, Case Code (Metric)=2012, Case Code (Imperial)=0805, Dielectric=X7R, Manufacturer=Samsung, Max Operating Temperature=125°C, Min Operating Temperature=-55°C, Supplier Part Number 1=1276-1003-1-ND, Tolerance=10%, Voltage=50V, Case/Package=0805, Category="Ceramic Capacitors", ComponentLink1Description=https://datasheet.ciiva.com/25710/cl21b104kbcnnnc-25710182.pdf?src-supplier=Digi-Key, ComponentLink1URL=https://datasheet.ciiva.com/25710/cl21b104kbcnnnc-25710182.pdf?src-supplier=Digi-Key, ComponentLink2Description=https://datasheet.ciiva.com/29199/454152-da-01-en-vs-kondensator-0805-29199814.pdf?src-supplier=Conrad, ComponentLink2URL=https://datasheet.ciiva.com/29199/454152-da-01-en-vs-kondensator-0805-29199814.pdf?src-supplier=Conrad, Construction=Flat, Contact Plating=Tin, Depth=1.25mm, Designed by=BERK, Height=0.85mm, Lead Free="Lead Free", Length=2mm, Manufacturer Part Number=CL21B104KBCNNNC, Material=Ceramic, Mount="Surface Mount", Packaging="Tape and Reel", Pricing 1="1=0,10000, 10=0,04700, 50=0,02560, 100=0,02090, 500=0,01494, 1000=0,01174 (USD)", Radiation Hardening=No, RoHS=Yes, RoHS Compliant=Yes, series=CL, Stock 1=3371502, Supplier 1=Digi-Key, Thickness=0.037inch, Voltage Rating=50V, Voltage Rating (DC)=50V, Width=0.049inch
C6: library part "CAP ALU 68uF", "Cap Aluminum Lytic 68uF 35V 20% (6.3 X 7.7mm) SMD 280mA 2000h 105C T/R", Capacitance=68uF, Case/Package=Radial, Manufacturer=KEMET, Max Operating Temperature=105°C, Min Operating Temperature=-40°C, Package Quantity=1, Ripple Current=196mA, Supplier Part Number 1=399-6722-1-ND, Tolerance=20%, Voltage Rating=35V, Category="Aluminum Electrolytic Capacitors", ComponentLink1Description=https://datasheet.ciiva.com/5365/kem-a4002-eev-535332-5365784.pdf?src-supplier=Mouser, ComponentLink1URL=https://datasheet.ciiva.com/5365/kem-a4002-eev-535332-5365784.pdf?src-supplier=Mouser, Designator by=BERK, Height - Seated (Max)=0.315inch, Length=7.7mm, Life (Hours)=2000Hour, Manufacturer Part Number=EEV686M035A9HAA, Mount="Surface Mount", Packaging="Tape and Reel", Pricing 1="1=0,54000, 10=0,38000, 50=0,28740, 100=0,25040, 500=0,18546 (USD)", RoHS=Yes, RoHS Compliant=Yes, series=EEV, Stock 1=543, Supplier 1=Digi-Key, Termination=SMD/SMT, Voltage Rating (DC)=35V, Impedance=340mR
C7 C33 C38: library part "CAP CER 10nF 0603", "CAP CER 10nF %10 0603", Capacitance=10nF, Case Code (Metric)=1608, Case Code (Imperial)=0603, Dielectric=X7R, Manufacturer="Walsin Technologies", Max Operating Temperature=125°C, Min Operating Temperature=-55°C, Supplier Part Number 1=1292-1384-1-ND, Tolerance=10%, Voltage Rating=16V, Case/Package=0603, Category="Ceramic Capacitors", ComponentLink1Description=http://www.farnell.com/datasheets/1958513.pdf?src-supplier=Farnell, ComponentLink1URL=http://www.farnell.com/datasheets/1958513.pdf?src-supplier=Farnell, ComponentLink2Description=http://components.arrow.com/part/dataview/0323_00656382?src-supplier=Arrow+Europe, ComponentLink2URL=http://components.arrow.com/part/dataview/0323_00656382?src-supplier=Arrow+Europe, ComponentLink3Description=http://www.farnell.com/datasheets/1958513.pdf?src-supplier=Element14, ComponentLink3URL=http://www.farnell.com/datasheets/1958513.pdf?src-supplier=Element14, ComponentLink4Description=http://www.passivecomponent.com/wp-content/uploads/2018/10/MLCC.pdf?src-supplier=Digi-Key, ComponentLink4URL=http://www.passivecomponent.com/wp-content/uploads/2018/10/MLCC.pdf?src-supplier=Digi-Key, Depth=0.8mm, Designed by=BERK, Length=1.6mm, Manufacturer Part Number=0603B103K160CT, Packaging="Tape and Reel", Pricing 1="1=0,10000, 10=0,03600, 50=0,01940, 100=0,01590, 500=0,01136, 1000=0,00892 (USD)", REACH SVHC=Unknown, RoHS=Yes, RoHS Compliant=Yes, Stock 1=102474, Supplier 1=Digi-Key, Voltage Rating (DC)=16V
C12 C20 C25 C26 C27 C28 C34 C37 C43 C44 C45: library part "CAP CER 100nF 0603", "CAP CER 100nF %10 0603 SMD", Capacitance=100nF, Case Code (Metric)=1608, Case Code (Imperial)=0603, Dielectric=X7R, Dielectric Material=Ceramic, Manufacturer=KEMET, Max Operating Temperature=125°C, Min Operating Temperature=-55°C, Package Quantity=1, Supplier Part Number 1=399-5089-1-ND, Tolerance=10%, Voltage=50V, Case/Package=0603, Category="Ceramic Capacitors", ComponentLink1Description=https://datasheet.ciiva.com/7823/kem-c1002-x7r-smd-7823591.pdf?src-supplier=Element14, ComponentLink1URL=https://datasheet.ciiva.com/7823/kem-c1002-x7r-smd-7823591.pdf?src-supplier=Element14, ComponentLink2Description=https://datasheet.ciiva.com/14602/70095383-14602583.pdf?src-supplier=Allied+Electronics, ComponentLink2URL=https://datasheet.ciiva.com/14602/70095383-14602583.pdf?src-supplier=Allied+Electronics, ComponentLink3Description=https://datasheet.ciiva.com/5999/kem-c1002-x7r-smd-5999400.pdf?src-supplier=Farnell, ComponentLink3URL=https://datasheet.ciiva.com/5999/kem-c1002-x7r-smd-5999400.pdf?src-supplier=Farnell, ComponentLink4Description=https://datasheet.ciiva.com/7823/kem-c1002-x7r-smd-7823592.pdf?src-supplier=Element14, ComponentLink4URL=https://datasheet.ciiva.com/7823/kem-c1002-x7r-smd-7823592.pdf?src-supplier=Element14, ComponentLink5Description=https://datasheet.ciiva.com/28645/1851736-28645640.pdf?src-supplier=Element14, ComponentLink5URL=https://datasheet.ciiva.com/28645/1851736-28645640.pdf?src-supplier=Element14, ComponentLink6Description=https://datasheet.ciiva.com/14585/70095383-14585209.pdf?src-supplier=Allied+Electronics, ComponentLink6URL=https://datasheet.ciiva.com/14585/70095383-14585209.pdf?src-supplier=Allied+Electronics, Contact Plating=Tin,Matte, Depth=0.8mm, Designed by=BERK, Dissipation Factor=2.5%, Height=0.8mm, Lead Pitch=0.7mm, Length=0.063inch, Manufacturer Part Number=C0603C104K5RACTU, Mount="Surface Mount", Number of Pins=2, Packaging="Tape and Reel", Pricing 1="1=0,12000, 10=0,08500, 50=0,04620, 100=0,03770, 500=0,02696, 1000=0,02118 (USD)", Radiation Hardening=No, REACH SVHC="No SVHC", RoHS=Yes, RoHS Compliant=Yes, series="SMD Comm X7R", Stock 1=1666186, Supplier 1=Digi-Key, Termination=SMD/SMT, Thickness=0.034inch, Voltage Rating=50V, Voltage Rating (DC)=50V, Width=0.031inch
C15 C19: library part "CAP CER 20pF 0603", "CAP CER 20pF %5 0603 SMD", Capacitance=20pF, Case Code (Metric)=1608, Case Code (Imperial)=0603, Dielectric=C0G, Manufacturer=Samsung, Max Operating Temperature=125°C, Min Operating Temperature=-55°C, Package Quantity=1, Supplier Part Number 1=1276-1187-1-ND, Temperature Coefficient=300ppm/°C, Tolerance=5%, Voltage=50V, Case/Package=0603, Category="Ceramic Capacitors", ComponentLink1Description=https://datasheet.ciiva.com/26877/getdatasheetpartid-640634-26877974.pdf?src-supplier=Verical, ComponentLink1URL=https://datasheet.ciiva.com/26877/getdatasheetpartid-640634-26877974.pdf?src-supplier=Verical, ComponentLink2Description=https://datasheet.ciiva.com/26310/mlcc-catalogdownload2013-eng-26310315.pdf?src-supplier=Distrelec, ComponentLink2URL=https://datasheet.ciiva.com/26310/mlcc-catalogdownload2013-eng-26310315.pdf?src-supplier=Distrelec, Construction=Flat, Depth=0.8mm, Designed by=BERK, Height=0.8mm, Length=1.6mm, Manufacturer Part Number=CL10C200JB8NNNC, Mount="Surface Mount", Packaging="Tape and Reel", Pricing 1="1=0,10000, 10=0,04700, 50=0,02560, 100=0,02090, 500=0,01490, 1000=0,01171 (USD)", Radiation Hardening=No, RoHS=Yes, RoHS Compliant=Yes, series=CL, Stock 1=765558, Supplier 1=Digi-Key, Thickness=0.035inch, Voltage Rating=50V, Width=0.031inch
C36 C39: library part "CAP CER 33uF 1206", "CAP CER 33uF %20 1206 SMD", Capacitance=33uF, Case Code (Metric)=3216, Case Code (Imperial)=1206, Dielectric=X5R, Dielectric Material=Ceramic, Manufacturer=TDK, Max Operating Temperature=85°C, Min Operating Temperature=-55°C, Package Quantity=1, Supplier Part Number 1=445-8046-1-ND, Tolerance=20%, Voltage Rating=25V, Case/Package=1206, Category="Ceramic Capacitors", ComponentLink1Description=https://datasheet.ciiva.com/24216/c3216x5r1e336m160ac-265051-24216512.pdf?src-supplier=Mouser, ComponentLink1URL=https://datasheet.ciiva.com/24216/c3216x5r1e336m160ac-265051-24216512.pdf?src-supplier=Mouser, ComponentLink2Description=https://datasheet.ciiva.com/6285/tdkmlcccaprange-6285278.pdf?src-supplier=Digi-Key, ComponentLink2URL=https://datasheet.ciiva.com/6285/tdkmlcccaprange-6285278.pdf?src-supplier=Digi-Key, Depth=1.6mm, Designed by=BERK, Lead Free="Lead Free", Length=3.2mm, Manufacturer Part Number=C3216X5R1E336M160AC, Mount="Surface Mount", Packaging="Tape and Reel", Pricing 1="1=1,04000, 10=0,82500, 50=0,71500, 100=0,61880, 500=0,46750, 1000=0,41250 (USD)", REACH SVHC="No SVHC", Resistor Type=Ceramic, RoHS=Yes, RoHS Compliant=Yes, series=C, Stock 1=149381, Supplier 1=Digi-Key, Termination=SMD/SMT, Thickness=1.6mm, Voltage Rating (DC)=25V, Weight=0.000571oz, Width=0.063inch
D1 D2 D3 D5 D8: "Diode, Single, 75 V, 150 mA, 1 V, 4 ns", Average Rectified Current=150mA, Forward Voltage=1V, Manufacturer="ON Semiconductor / Fairchild", Max Forward Surge Current (Ifsm)=2A, Max Operating Temperature=150°C, Max Repetitive Reverse Voltage (Vrrm)=75V, Max Reverse Current=5uA, Min Operating Temperature=-55°C, Package Quantity=1, Power Dissipation=200mW, Supplier Part Number 1=1N4148WSFSCT-ND, Category="Rectifier Diodes", ComponentLink1Description=https://datasheet.ciiva.com/25968/1n914bws-25968945.pdf?src-supplier=Avnet+Europe, ComponentLink1URL=https://datasheet.ciiva.com/25968/1n914bws-25968945.pdf?src-supplier=Avnet+Europe, ComponentLink2Description=https://datasheet.ciiva.com/30479/0900766b810e1cd3-30479206.pdf?src-supplier=RSComponents, ComponentLink2URL=https://datasheet.ciiva.com/30479/0900766b810e1cd3-30479206.pdf?src-supplier=RSComponents, ComponentLink3Description=https://datasheet.ciiva.com/910/1n4148ws-910381.pdf?src-supplier=Digi-Key, ComponentLink3URL=https://datasheet.ciiva.com/910/1n4148ws-910381.pdf?src-supplier=Digi-Key, ComponentLink4Description=https://datasheet.ciiva.com/15208/getdatasheetpartid-127819-15208358.pdf?src-supplier=Verical, ComponentLink4URL=https://datasheet.ciiva.com/15208/getdatasheetpartid-127819-15208358.pdf?src-supplier=Verical, ComponentLink5Description=https://datasheet.ciiva.com/8300/1n914bws-8300360.pdf?src-supplier=Avnet, ComponentLink5URL=https://datasheet.ciiva.com/8300/1n914bws-8300360.pdf?src-supplier=Avnet, ComponentLink6Description=https://datasheet.ciiva.com/910/1n4148ws-910380.pdf?src-supplier=Digi-Key, ComponentLink6URL=https://datasheet.ciiva.com/910/1n4148ws-910380.pdf?src-supplier=Digi-Key, ComponentLink7Description=https://datasheet.ciiva.com/910/1n4148ws-910382.pdf?src-supplier=Digi-Key, ComponentLink7URL=https://datasheet.ciiva.com/910/1n4148ws-910382.pdf?src-supplier=Digi-Key, Contact Plating=Tin,Matte, Designed by=BERK, Element Configuration=Single, Forward Current=150mA, Height=1mm, Lead Free="Lead Free", Length=1.8mm, Manufacturer Part Number=1N4148WS, Max Reverse Voltage (DC)=75V, Mount="Surface Mount", Number of Pins=2, Packaging="Tape and Reel", Pricing 1="1=0,17000, 10=0,12100, 100=0,06530, 500=0,05128, 1000=0,03562 (USD)", Radiation Hardening=No, REACH SVHC="No SVHC", Recovery Time=4ns, Reverse Recovery Time=4ns, Reverse Voltage=75V, RoHS=Yes, RoHS Compliant=Yes, series=-, Stock 1=79118, Supplier 1=Digi-Key, Weight=0.0276g, Width=1.35mm
D4: "Diode Zener Single 5.6V 5% 3W 2-Pin SMB T/R", Breakdown Voltage=5.88V, Case/Package=SMB, Forward Voltage=1.5V, Manufacturer="ON Semiconductor", Max Operating Temperature=150°C, Max Power Dissipation=3W, Max Reverse Current=5uA, Min Operating Temperature=-65°C, Package Quantity=1, Power Dissipation=550mW, Supplier Part Number 1=1SMB5919BT3GOSCT-ND, Test Current=66.9mA, Tolerance=5%, Voltage Rating (DC)=5.6V, Zener Current=267mA, Category="Zener Diodes", ComponentLink1Description=https://datasheet.ciiva.com/27747/1308331-27747654.pdf?src-supplier=Jameco, ComponentLink1URL=https://datasheet.ciiva.com/27747/1308331-27747654.pdf?src-supplier=Jameco, ComponentLink2Description=https://datasheet.ciiva.com/1182/1smb5913bt3-d-1182657.pdf?src-supplier=Element14, ComponentLink2URL=https://datasheet.ciiva.com/1182/1smb5913bt3-d-1182657.pdf?src-supplier=Element14, ComponentLink3Description=https://datasheet.ciiva.com/1182/1smb5913bt3-d-1182658.pdf?src-supplier=Element14, ComponentLink3URL=https://datasheet.ciiva.com/1182/1smb5913bt3-d-1182658.pdf?src-supplier=Element14, ComponentLink4Description=https://datasheet.ciiva.com/895/1smb5913bt3-d-895203.pdf?src-supplier=Digi-Key, ComponentLink4URL=https://datasheet.ciiva.com/895/1smb5913bt3-d-895203.pdf?src-supplier=Digi-Key, ComponentLink5Description=https://datasheet.ciiva.com/895/1smb5913bt3-d-895204.pdf?src-supplier=Digi-Key, ComponentLink5URL=https://datasheet.ciiva.com/895/1smb5913bt3-d-895204.pdf?src-supplier=Digi-Key, ComponentLink6Description=https://datasheet.ciiva.com/895/1smb5913bt3-d-895205.pdf?src-supplier=Digi-Key, ComponentLink6URL=https://datasheet.ciiva.com/895/1smb5913bt3-d-895205.pdf?src-supplier=Digi-Key, ComponentLink7Description=https://datasheet.ciiva.com/15198/getdatasheetpartid-311040-15198695.pdf?src-supplier=Verical, ComponentLink7URL=https://datasheet.ciiva.com/15198/getdatasheetpartid-311040-15198695.pdf?src-supplier=Verical, ComponentLink8Description=https://datasheet.ciiva.com/16311/1smb5913bt3-d-16311847.pdf?src-supplier=Future+Electronics, ComponentLink8URL=https://datasheet.ciiva.com/16311/1smb5913bt3-d-16311847.pdf?src-supplier=Future+Electronics, ComponentLink9Description=https://datasheet.ciiva.com/16472/1smb5913bt3-d-16472779.pdf?src-supplier=Avnet+Asia, ComponentLink9URL=https://datasheet.ciiva.com/16472/1smb5913bt3-d-16472779.pdf?src-supplier=Avnet+Asia, Contact Plating=Tin,Matte, Designed by=BERK, Element Configuration=Single, ESD Protection=Yes, Halogen Free="Halogen Free", Height=2.13mm, Lead Free="Lead Free", Length=4.32mm, Manufacturer Part Number=1SMB5919BT3G, Material=Plastic, Max Reverse Leakage Current=5uA, Number of Pins=2, Packaging="Tape and Reel", Power Rating=3W, Pricing 1="1=0,45000, 10=0,31900, 100=0,16110, 500=0,14274, 1000=0,11109 (USD)", Radiation Hardening=No, REACH SVHC="No SVHC", RoHS=Yes, Supplier 1=Digi-Key, Voltage Tolerance=5%, Width=3.56mm, Working Voltage=5.6V, Zener Voltage=5.6V, Impedance=2R
D6: library part "LED GREEN 0805", "Green 0805 130 º Min 5 mcd Typical 12 mcd Water Clear Lens SMT LED", Case Code (Metric)=2012, Case Code (Imperial)=0805, Color=Green, Forward Current=30mA, Forward Voltage=2.1V, Lens Color=Colorless, Manufacturer="Vishay Lite-On", Max Operating Temperature=85°C, Min Operating Temperature=-55°C, Package Quantity=1, Power Dissipation=100mW, Reverse Voltage=5V, Supplier Part Number 1=160-1423-1-ND, Test Current=10mA, Case/Package=0805, Category=LEDs, ComponentLink1Description=https://datasheet.ciiva.com/2110/ltst-c171gkt-2110000.pdf?src-supplier=Digi-Key, ComponentLink1URL=https://datasheet.ciiva.com/2110/ltst-c171gkt-2110000.pdf?src-supplier=Digi-Key, ComponentLink2Description=https://datasheet.ciiva.com/11773/0900766b80dc0296-11773991.pdf?src-supplier=RSComponents, ComponentLink2URL=https://datasheet.ciiva.com/11773/0900766b80dc0296-11773991.pdf?src-supplier=RSComponents, ComponentLink3Description=https://datasheet.ciiva.com/12400/lite-on-ltst-c171gkt-190133-12400647.pdf?src-supplier=Mouser, ComponentLink3URL=https://datasheet.ciiva.com/12400/lite-on-ltst-c171gkt-190133-12400647.pdf?src-supplier=Mouser, ComponentLink4Description=https://datasheet.ciiva.com/2110/ltst-c171gkt-2110001.pdf?src-supplier=Digi-Key, ComponentLink4URL=https://datasheet.ciiva.com/2110/ltst-c171gkt-2110001.pdf?src-supplier=Digi-Key, ComponentLink5Description=https://datasheet.ciiva.com/2110/ltst-c171gkt-2110002.pdf?src-supplier=Digi-Key, ComponentLink5URL=https://datasheet.ciiva.com/2110/ltst-c171gkt-2110002.pdf?src-supplier=Digi-Key, ComponentLink6Description=https://datasheet.ciiva.com/16396/ltst-c171gkt-16396549.pdf?src-supplier=Future+Electronics, ComponentLink6URL=https://datasheet.ciiva.com/16396/ltst-c171gkt-16396549.pdf?src-supplier=Future+Electronics, Depth=1.25mm, Designed by=BERK, Dominant Wavelength=569nm, Height=0.8mm, Lead Free="Lead Free", Length=2mm, Lens Style=Diffused,Colorless,Rectangular,Clear, Lens Transparency=Clear, Luminous Intensity=12mcd, Manufacturer Part Number=LTST-C171GKT, Mount="Surface Mount", Number of Elements=1, Number of LEDs=1, Number of Pins=2, Packaging="Tape and Reel", Power Rating=100mW, Pricing 1="1=0,26000, 10=0,14100, 100=0,06560, 500=0,06060, 1000=0,04747 (USD)", Radiation Hardening=No, RoHS=Yes, RoHS Compliant=Yes, series="CHIPLED 0805", Stock 1=159023, Supplier 1=Digi-Key, Viewing Angle=130°, Wavelength=585nm, Width=1.25mm, Illumination Color=Green
D7: library part "LED RED 0805", "LED Uni-Color Hyper Red 660nm 2-Pin Chip 0805(2012Metric) T/R", Case Code (Metric)=2012, Case Code (Imperial)=0805, Color=Red, Forward Current=30mA, Forward Voltage=1.8V, Lens Color=White, Manufacturer="Osram Opto", Max Operating Temperature=85°C, Min Operating Temperature=-30°C, Package Quantity=1, Reverse Voltage=5V, Supplier Part Number 1=475-1415-1-ND, Test Current=20mA, Case/Package=0805, Category=LEDs, ComponentLink1Description=http://www.jameco.com/Jameco/Products/ProdDS/2085634.pdf?src-supplier=Jameco, ComponentLink1URL=http://www.jameco.com/Jameco/Products/ProdDS/2085634.pdf?src-supplier=Jameco, ComponentLink2Description=http://components.arrow.com/part/dataview/0323_01825492?src-supplier=Arrow+Europe, ComponentLink2URL=http://components.arrow.com/part/dataview/0323_01825492?src-supplier=Arrow+Europe, ComponentLink3Description=https://dammedia.osram.info/media/resource/hires/osram-dam-2493888/LH%20R974.pdf?src-supplier=Digi-Key, ComponentLink3URL=https://dammedia.osram.info/media/resource/hires/osram-dam-2493888/LH%20R974.pdf?src-supplier=Digi-Key, ComponentLink4Description=http://www.mouser.com/ds/2/311/LH%20R974%20-%20CHIPLED%200805-318659.pdf?src-supplier=Mouser, ComponentLink4URL=http://www.mouser.com/ds/2/311/LH%20R974%20-%20CHIPLED%200805-318659.pdf?src-supplier=Mouser, ComponentLink5Description=https://www.verical.com/server-webapp/html/getDatasheet?partID=258950&src-supplier=Verical, ComponentLink5URL=https://www.verical.com/server-webapp/html/getDatasheet?partID=258950&src-supplier=Verical, ComponentLink6Description=http://components.arrow.com/part/dataview/41971690S1077610N9133?src-supplier=Arrow+Electronics, ComponentLink6URL=http://components.arrow.com/part/dataview/41971690S1077610N9133?src-supplier=Arrow+Electronics, ComponentLink7Description=http://components.arrow.com/part/dataview/41971690S6190115N2128?src-supplier=Arrow+Electronics, ComponentLink7URL=http://components.arrow.com/part/dataview/41971690S6190115N2128?src-supplier=Arrow+Electronics, Depth=1.35mm, Designed by=BERK, Dominant Wavelength=645nm, Length=2.1mm, Lens Size=1.25mm, Lens Style=Diffused,Flat,Colorless, Lens Transparency=Diffused, Luminous Flux=0.17lm, Luminous Intensity=71mcd, Manufacturer Part Number="LH R974-LP-1", Mount="Surface Mount", Number of Elements=1, Number of Pins=2, Packaging="Tape and Reel", Pricing 1="1=0,26000, 10=0,13900, 100=0,06480, 500=0,05978, 1000=0,04683, 2000=0,04584 (USD)", Radiation Hardening=No, RoHS=Yes, RoHS Compliant=Yes, series=CHipLED, Stock 1=35632, Supplier 1=Digi-Key, Viewing Angle=160°, Width=1.25mm, Illumination Color=Red
F1: library part "FUSE 3413.0216.22", "FUSE BRD MNT 1A 32VAC 63VDC 1206", Case Code (Metric)=3216, Case Code (Imperial)=1206, Current Rating=1A, DC Cold Resistance=94.2mR, Manufacturer=Schurter, Max Operating Temperature=90°C, Max Voltage Rating (AC)=32V, Max Voltage Rating (DC)=63V, Min Operating Temperature=-55°C, Package Quantity=1000, Supplier Part Number 1=486-1144-1-ND, Approvals=VDE,cURus, Body Material=Glass,Epoxy, Case/Package=1206, Category=Fuses, ComponentLink1Description=https://datasheet.ciiva.com/301/typ-usi-1206-301440.pdf?src-supplier=Digi-Key, ComponentLink1URL=https://datasheet.ciiva.com/301/typ-usi-1206-301440.pdf?src-supplier=Digi-Key, ComponentLink2Description=https://datasheet.ciiva.com/14541/70160006-14541114.pdf?src-supplier=Allied+Electronics, ComponentLink2URL=https://datasheet.ciiva.com/14541/70160006-14541114.pdf?src-supplier=Allied+Electronics, ComponentLink3Description=https://datasheet.ciiva.com/301/typ-usi-1206-301439.pdf?src-supplier=Digi-Key, ComponentLink3URL=https://datasheet.ciiva.com/301/typ-usi-1206-301439.pdf?src-supplier=Digi-Key, ComponentLink4Description=https://datasheet.ciiva.com/301/typ-usi-1206-301441.pdf?src-supplier=Digi-Key, ComponentLink4URL=https://datasheet.ciiva.com/301/typ-usi-1206-301441.pdf?src-supplier=Digi-Key, ComponentLink5Description=https://datasheet.ciiva.com/8264/typ-usi-1206-8264583.pdf?src-supplier=Avnet, ComponentLink5URL=https://datasheet.ciiva.com/8264/typ-usi-1206-8264583.pdf?src-supplier=Avnet, ComponentLink6Description=https://datasheet.ciiva.com/14102/qousi1206-data-e-14102903.pdf?src-supplier=Distrelec, ComponentLink6URL=https://datasheet.ciiva.com/14102/qousi1206-data-e-14102903.pdf?src-supplier=Distrelec, ComponentLink7Description=https://datasheet.ciiva.com/17405/typ-usi-1206-17405433.pdf?src-supplier=Avnet+Europe, ComponentLink7URL=https://datasheet.ciiva.com/17405/typ-usi-1206-17405433.pdf?src-supplier=Avnet+Europe, ComponentLink8Description=https://datasheet.ciiva.com/16316/typ-usi-1206-16316588.pdf?src-supplier=Future+Electronics, ComponentLink8URL=https://datasheet.ciiva.com/16316/typ-usi-1206-16316588.pdf?src-supplier=Future+Electronics, Contact Plating=Gold, Depth=1.6mm, Designed by=BERK, Fuse Type="Board Mount (Cartridge Style Excluded)", Height=0.6mm, Housing Material=Glass, Lead Free="Lead Free", Length=3.2mm, Manufacturer Part Number=3413.0216.22, Mount="Surface Mount,PCB", Number of Pins=2, Packaging="Tape and Reel", Pricing 1="1=0,67000, 50=0,52400, 100=0,39700, 500=0,31100 (USD)", Radiation Hardening=No, RoHS=Yes, RoHS Compliant=Yes, series="USI 1206", Stock 1=609, Supplier 1=Digi-Key, Terminal Material=Tin, Termination=SMD/SMT, Voltage Rating=32V, Voltage Rating (AC)=32V, Voltage Rating (DC)=63V, Weight=0.000212oz, Width=1.6mm, Working Voltage=32V
J1 J2 J3: "Conn Shrouded Header HDR 2 POS 5.08mm Solder RA Side Entry Thru-Hole Bag", Manufacturer=CUI, Supplier Part Number 1=102-6406-ND, Designed by=BERK, Manufacturer Part Number=TBP01R1-508-02BE, Pricing 1="1=0,50000, 10=0,26500, 25=0,18760, 50=0,15960, 100=0,15400, 250=0,13020, 500=0,12040, 1000=0,10640, 5000=0,08120 (USD)", RoHS=No, Stock 1=3398, Supplier 1=Digi-Key
J4 J5: "DC Power Connectors Power Jacks", Case/Package=SMD/SMT, Color=Black, Current Rating=5A, Flammability Rating="UL94 V-0", Manufacturer=CUI, Max Operating Temperature=85°C, Min Operating Temperature=-25°C, Package Quantity=200, Supplier Part Number 1=CP-037AHPJCT-ND, Voltage Rating=24V, Insulation Resistance=100MR, Category=Connectors, ComponentLink1Description=http://www.mouser.com/ds/2/670/pj-037ah-smt-516065.pdf?src-supplier=Mouser, ComponentLink1URL=http://www.mouser.com/ds/2/670/pj-037ah-smt-516065.pdf?src-supplier=Mouser, ComponentLink2Description=https://www.cui.com/product/resource/digikeypdf/pj-037ah-smt-tr.pdf?src-supplier=Digi-Key, ComponentLink2URL=https://www.cui.com/product/resource/digikeypdf/pj-037ah-smt-tr.pdf?src-supplier=Digi-Key, ComponentLink3Description=http://www.cui.com/product/resource/digikeypdf/pj-037ah-smt.pdf?src-supplier=Digi-Key, ComponentLink3URL=http://www.cui.com/product/resource/digikeypdf/pj-037ah-smt.pdf?src-supplier=Digi-Key, Connector Type=Jack, Contact Gender=Male, Contact Material=Copper, Contact Plating=Nickel, Designed by=BERK, Gender=Male, Housing Color=Black, Housing Material=Thermoplastic, Manufacturer Part Number=PJ-037AH-SMT-TR, Mount="Surface Mount,Through Hole", Number of Conductors=2, Orientation=Horizontal, Packaging="Tape and Reel", Pricing 1="1=1,36000, 10=1,19300, 25=1,12320, 50=1,07640, 100=1,02960 (USD)", RoHS=Yes, Shielding=Unshielded, Stock 1=4972, Supplier 1=Digi-Key, Termination=Solder
J6: ".100 C.L. HORIZONTAL SMT SOCKET", Contact Resistance=10mR, Housing Color=Black, Manufacturer=Samtec, Max Operating Temperature=125°C, Min Operating Temperature=-55°C, Supplier Part Number 1=SAM11813-ND, Category="Headers and Wire Housings", ComponentLink1Description=http://components.arrow.com/part/dataview/0323_04802604?src-supplier=Arrow+Europe, ComponentLink1URL=http://components.arrow.com/part/dataview/0323_04802604?src-supplier=Arrow+Europe, ComponentLink2Description=http://www.farnell.com/datasheets/1927708.pdf?_ga=2.237598468.569325269.1503285096-1413671594.1503025027&src-supplier=Farnell, ComponentLink2URL=http://www.farnell.com/datasheets/1927708.pdf?_ga=2.237598468.569325269.1503285096-1413671594.1503025027&src-supplier=Farnell, ComponentLink3Description=ftp://ftp.samtec.com/webfiles/PDF/SMH.PDF?src-supplier=Avnet+Europe, ComponentLink3URL=ftp://ftp.samtec.com/webfiles/PDF/SMH.PDF?src-supplier=Avnet+Europe, ComponentLink4Description=http://www.samtec.com/documents/webfiles/pdf/SMH.PDF?src-supplier=Newark, ComponentLink4URL=http://www.samtec.com/documents/webfiles/pdf/SMH.PDF?src-supplier=Newark, ComponentLink5Description=http://www.samtec.com/documents/webfiles/pdf/SMH.PDF?src-supplier=Avnet, ComponentLink5URL=http://www.samtec.com/documents/webfiles/pdf/SMH.PDF?src-supplier=Avnet, ComponentLink6Description=http://suddendocs.samtec.com/catalog_english/smh.pdf?src-supplier=Digi-Key, ComponentLink6URL=http://suddendocs.samtec.com/catalog_english/smh.pdf?src-supplier=Digi-Key, Contact Material=Bronze, Contact Plating=Gold, Depth=10.8mm, Designed by=BERK, Gender=Receptacle, Housing Material=Polymer, Length=13.21mm, Manufacturer Part Number=SMH-105-02-L-S, Number of Contacts=4, Number of Rows=1, Orientation=Horizontal, Packaging=Rail/Tube, Pitch=2.54mm, Pricing 1="1=1,40000, 10=1,27400, 100=1,09200, 500=0,91000, 1000=0,78000, 5000=0,69160, 10000=0,67600 (USD)", Radiation Hardening=No, REACH SVHC="No SVHC", RoHS=Yes, Stock 1=59, Supplier 1=Digi-Key, Termination=Solder
J7 J8: library part 64800611622_conn_6pin, "1.50mm 6PIN Connector", Manufacturer="Wurth Electronics", Supplier Part Number 1=2138726, Manufacturer Part Number=64800611622, Pricing 1="1000=0,29900, 2000=0,28200 (GBP)", RoHS=No, Stock 1=100, Supplier 1=RSComponents